# Altium PCB My_PCB.PcbDoc (part 1 of 2)
Units mm, origin at the board's own origin, x right, y up, seen from the top; angles counter-clockwise.
Board outline 160 x 126 mm, 4 copper layers (Top Layer, Layer 1, Layer 2, Bottom Layer), stack 1.646 mm thick; 190 components, 111 nets, 517 pads, 777 vias.
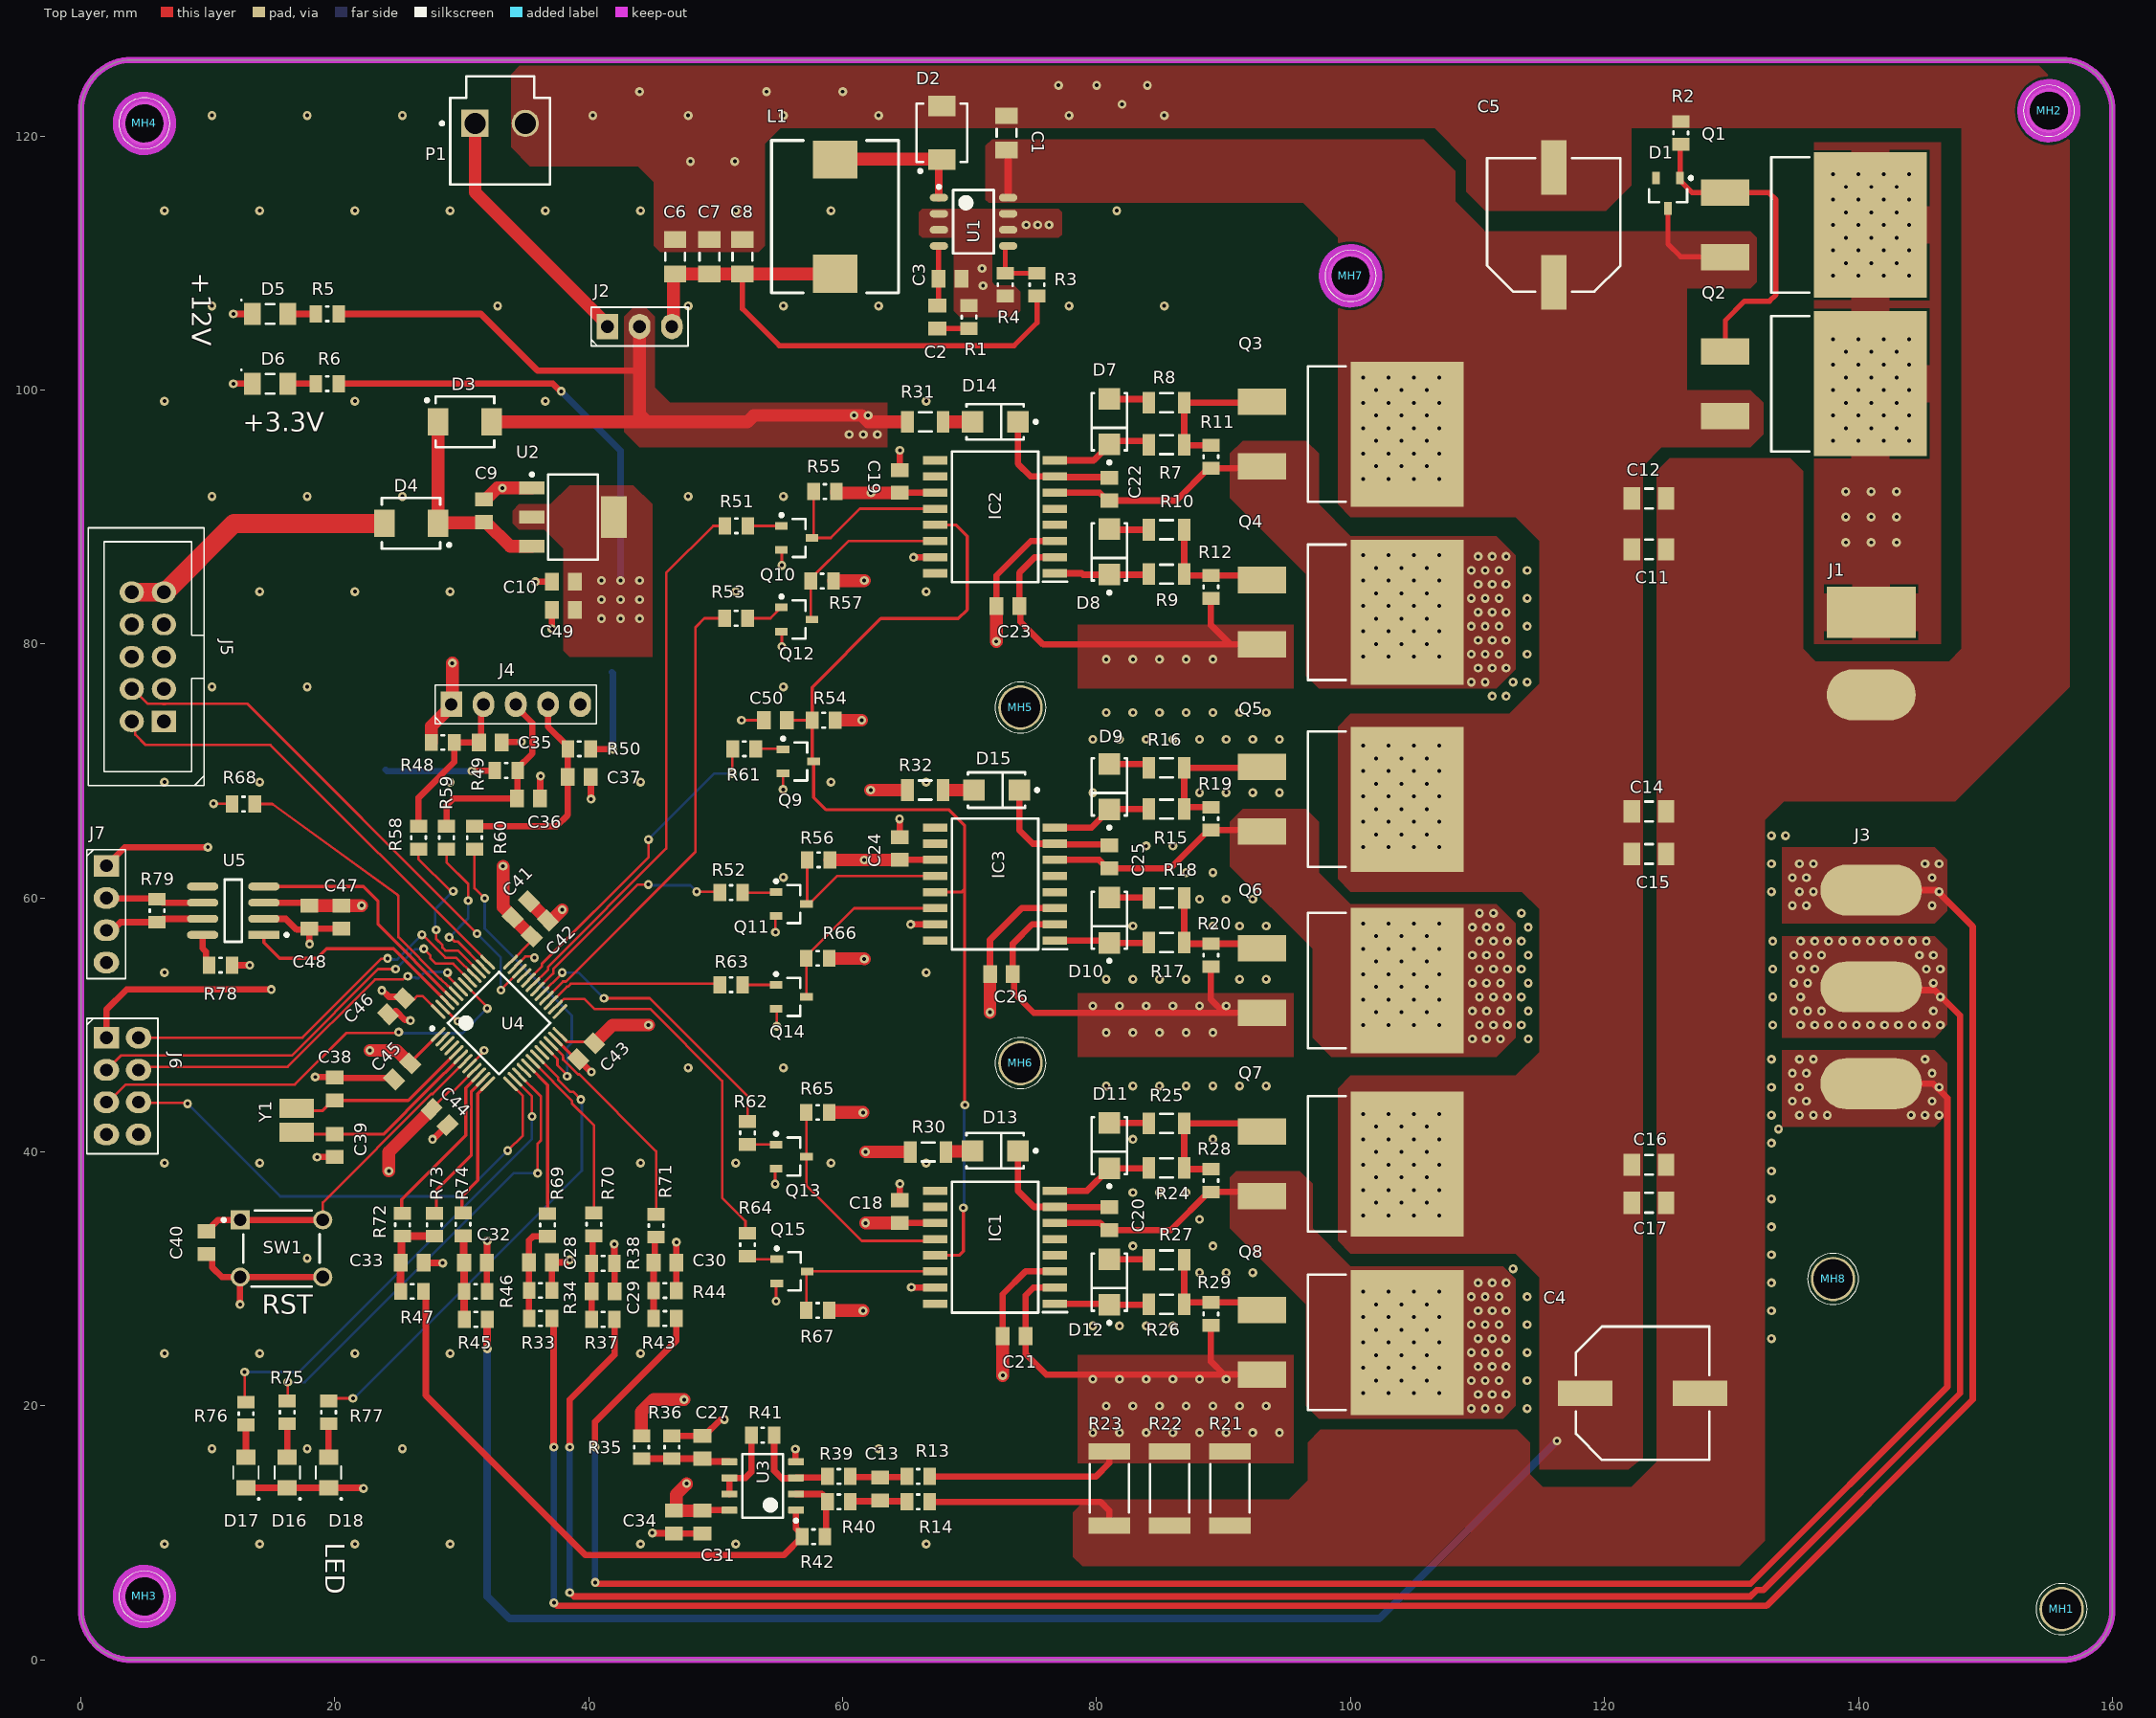
[diagram p0: Top Layer view]
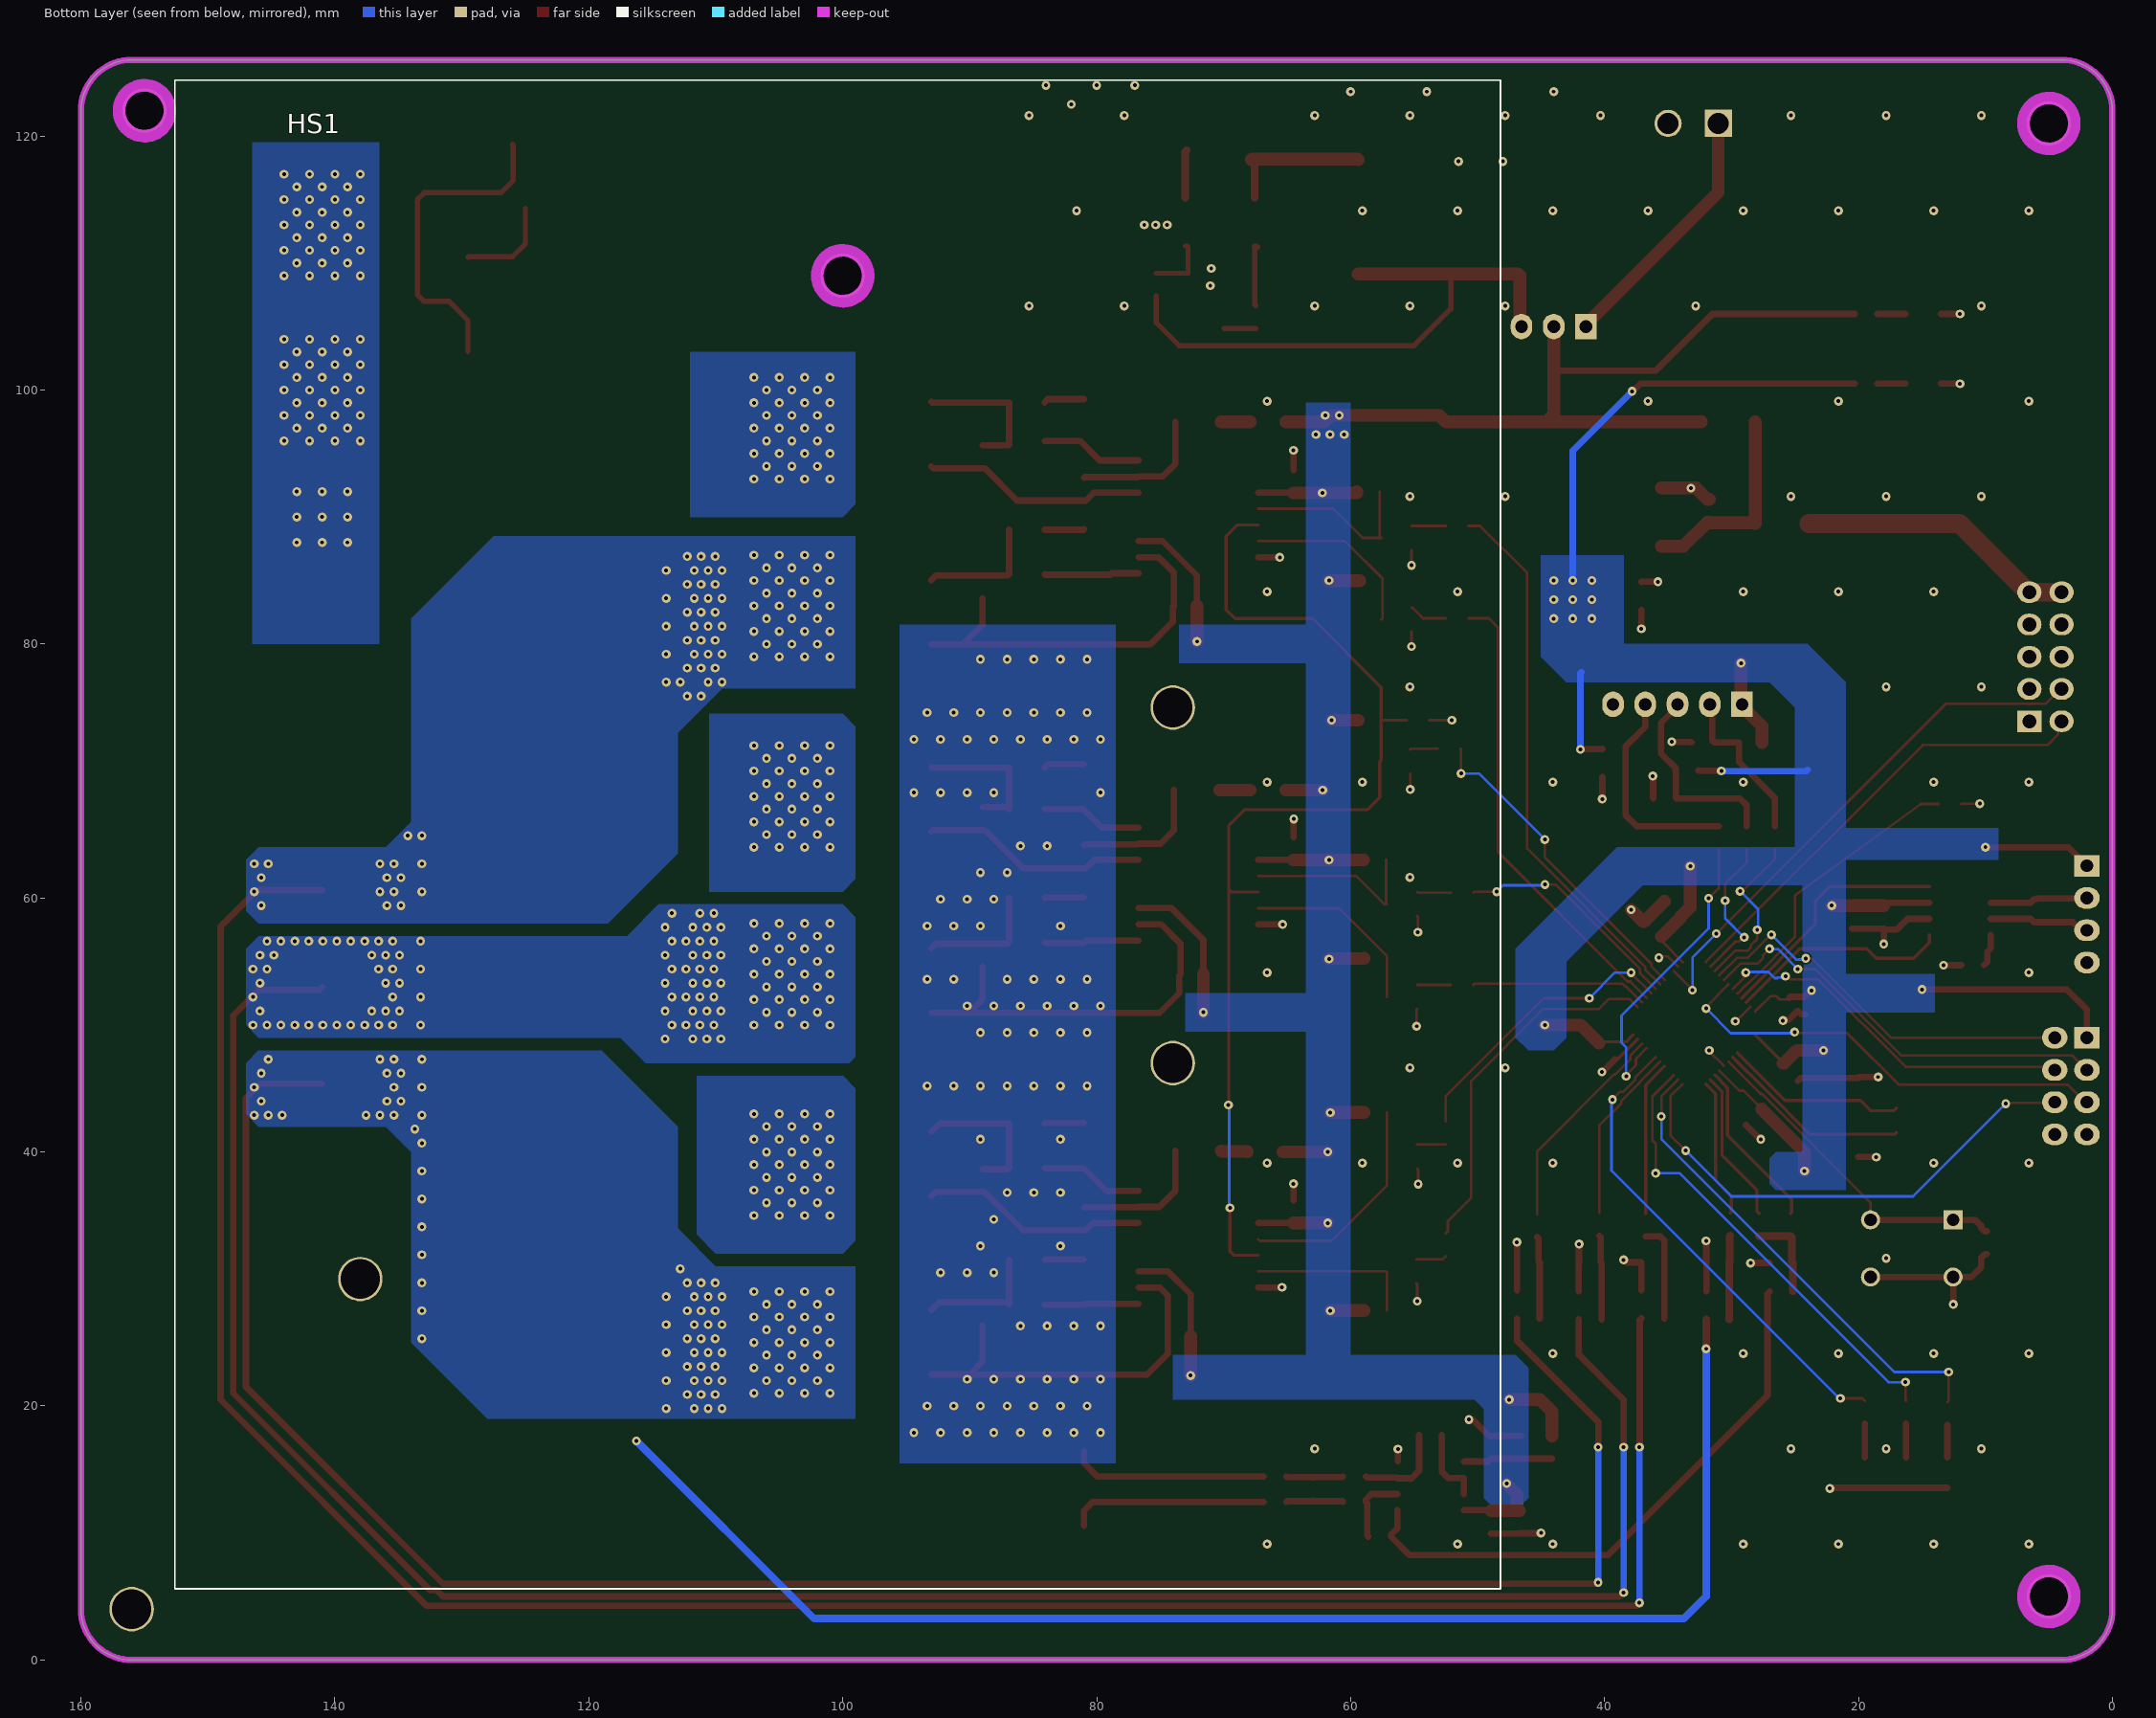
[diagram p1: Bottom Layer view, seen from below]
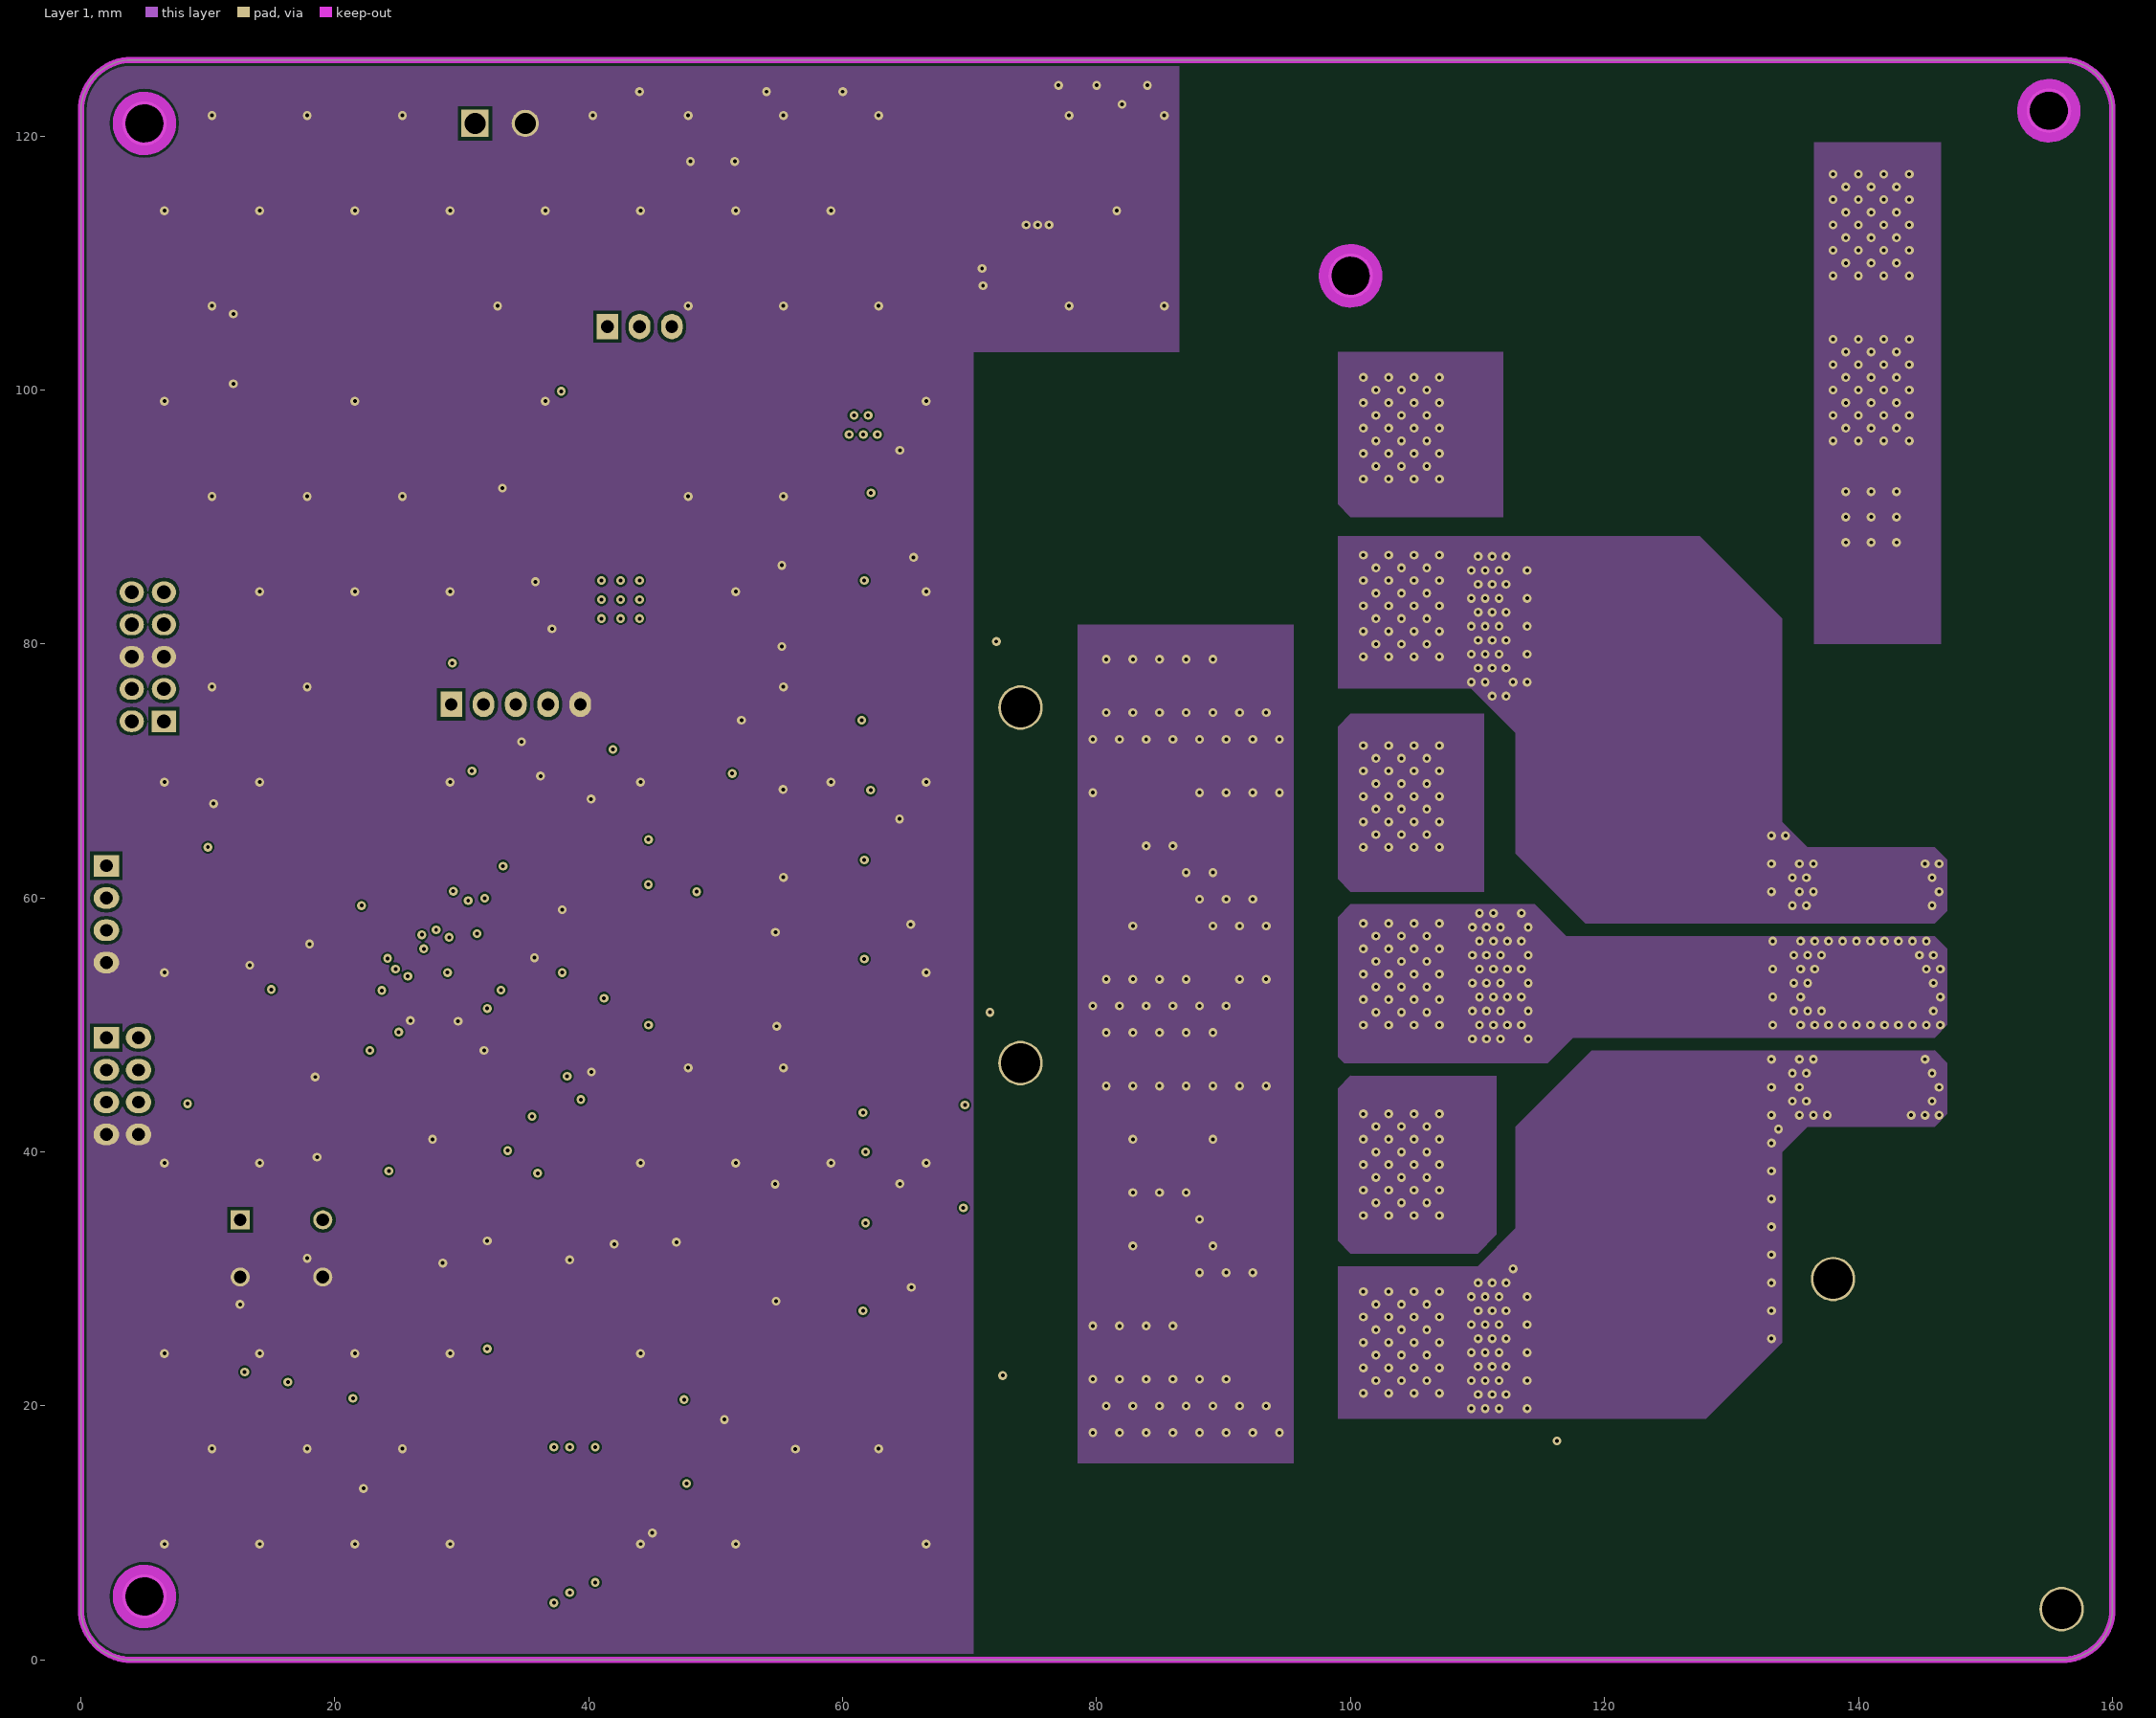
[diagram p2: Layer 1]
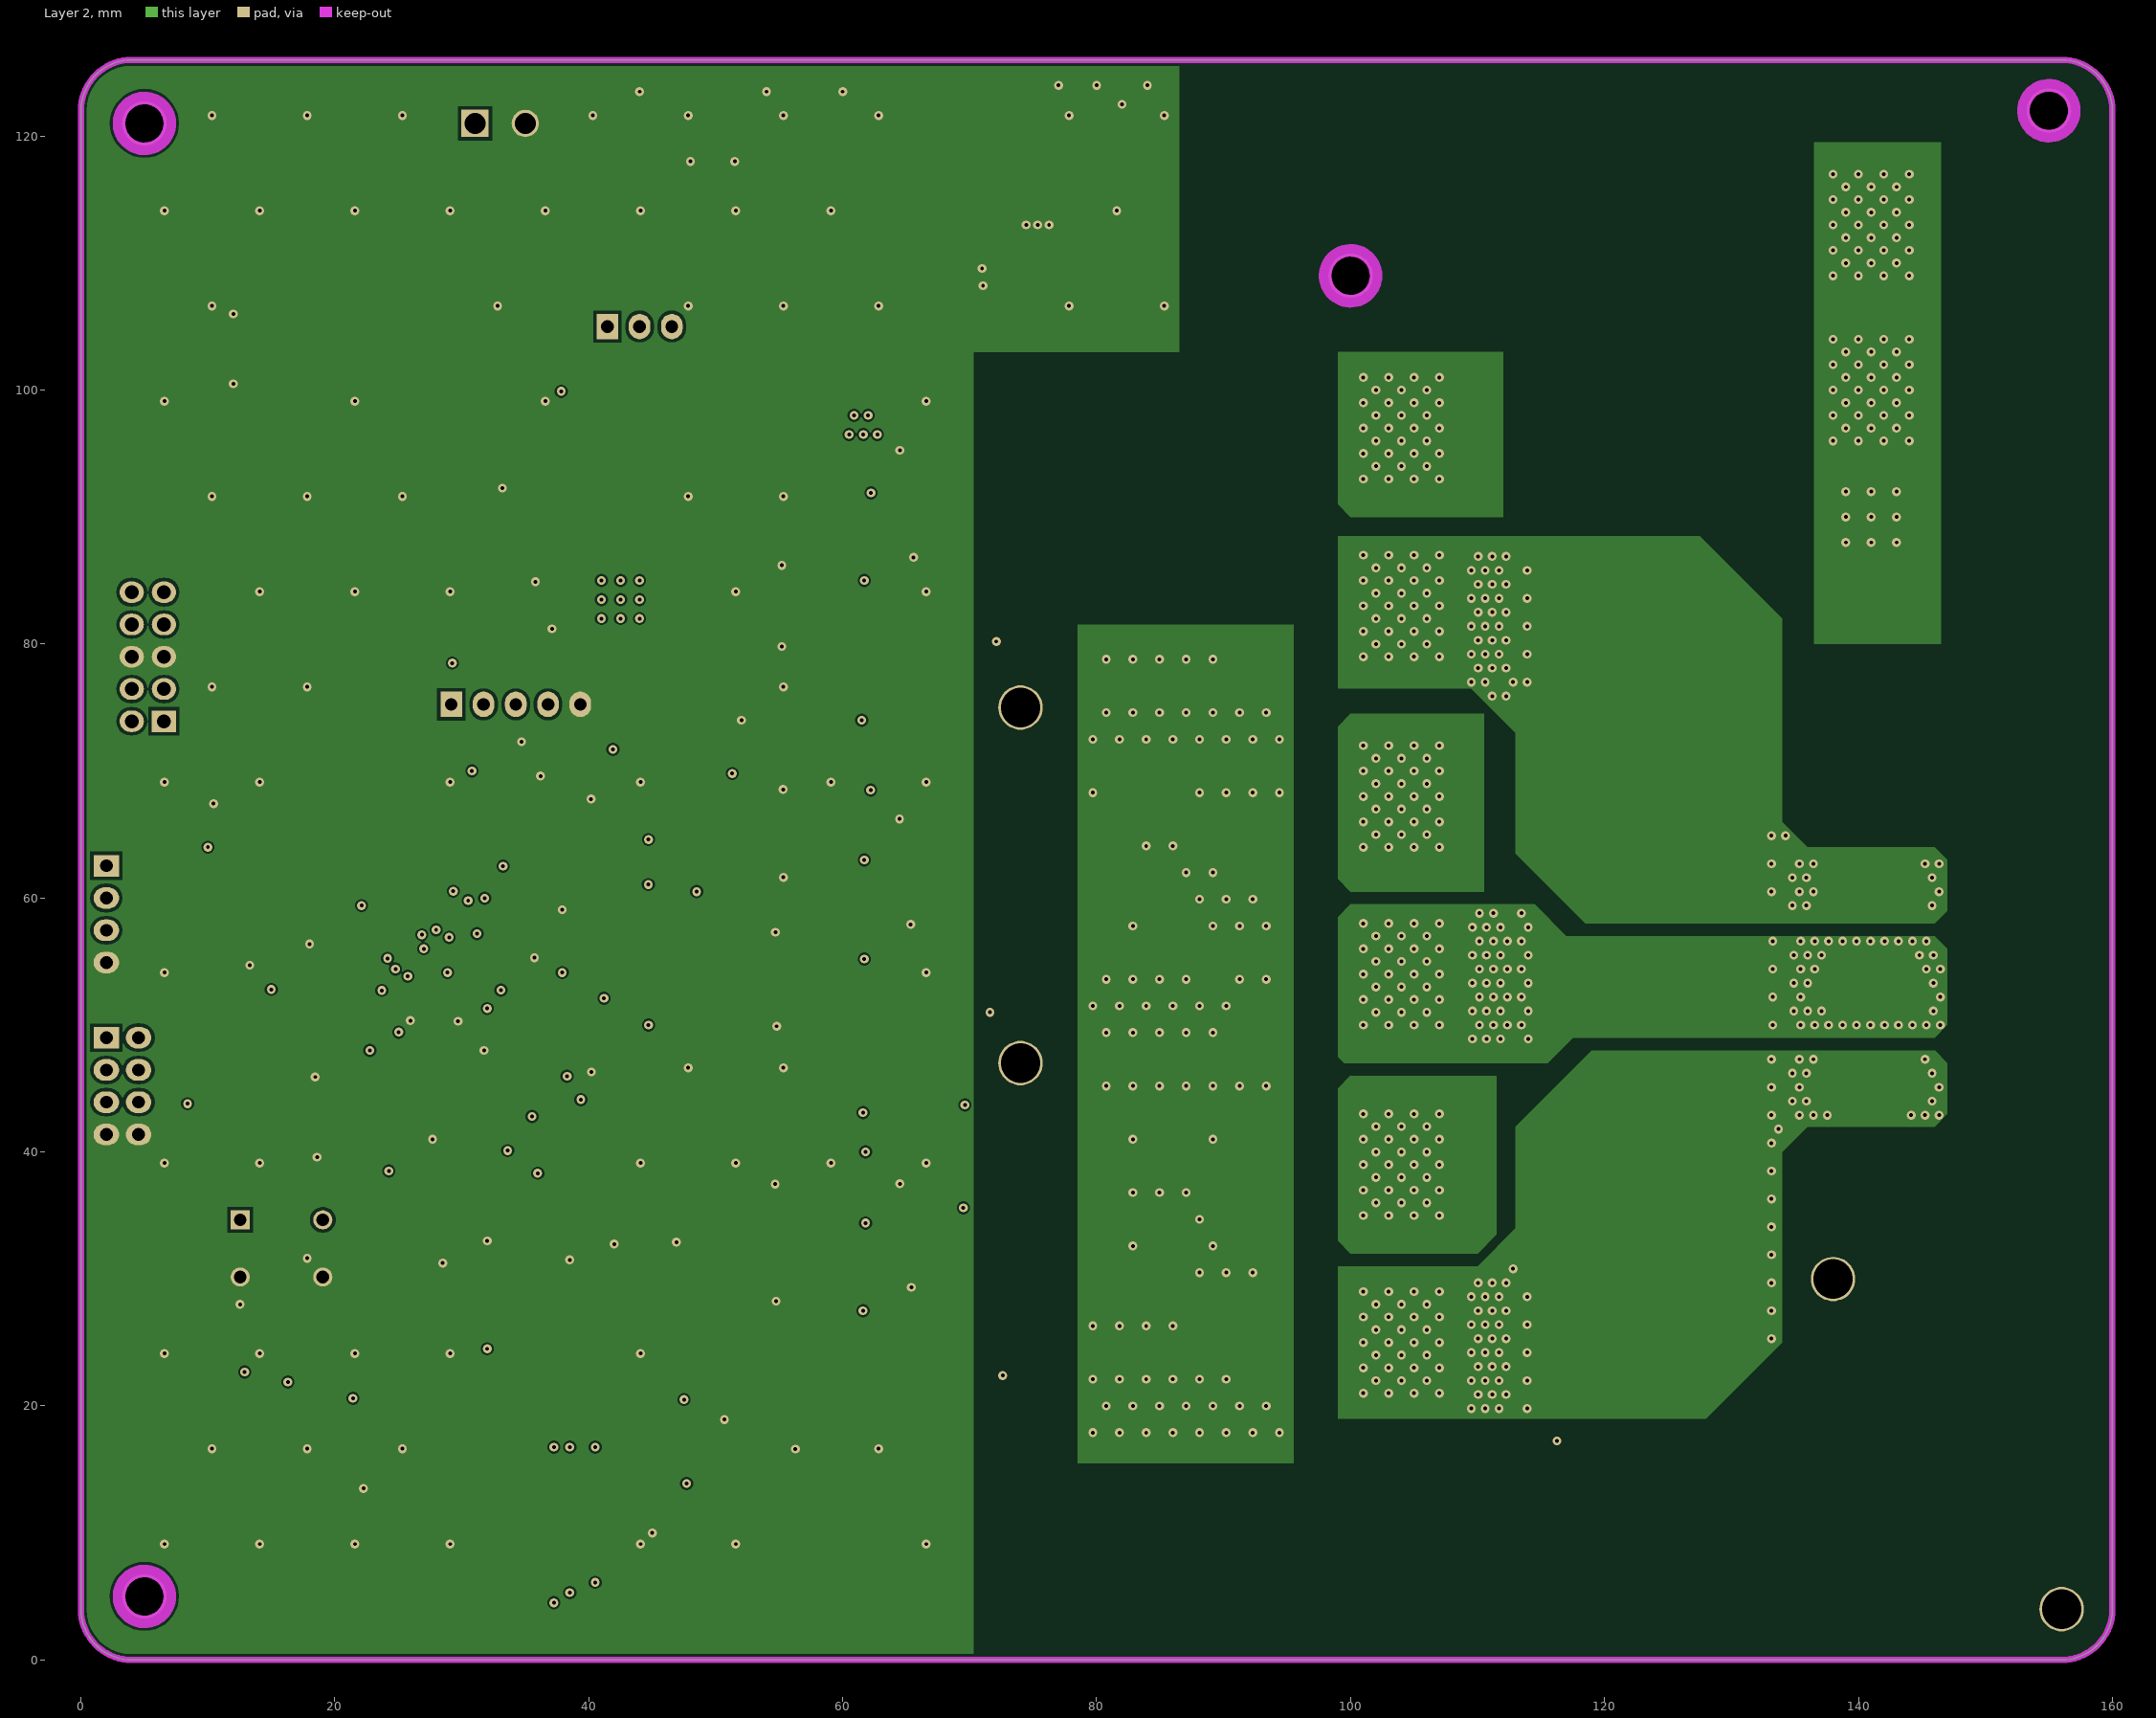
[diagram p3: Layer 2]
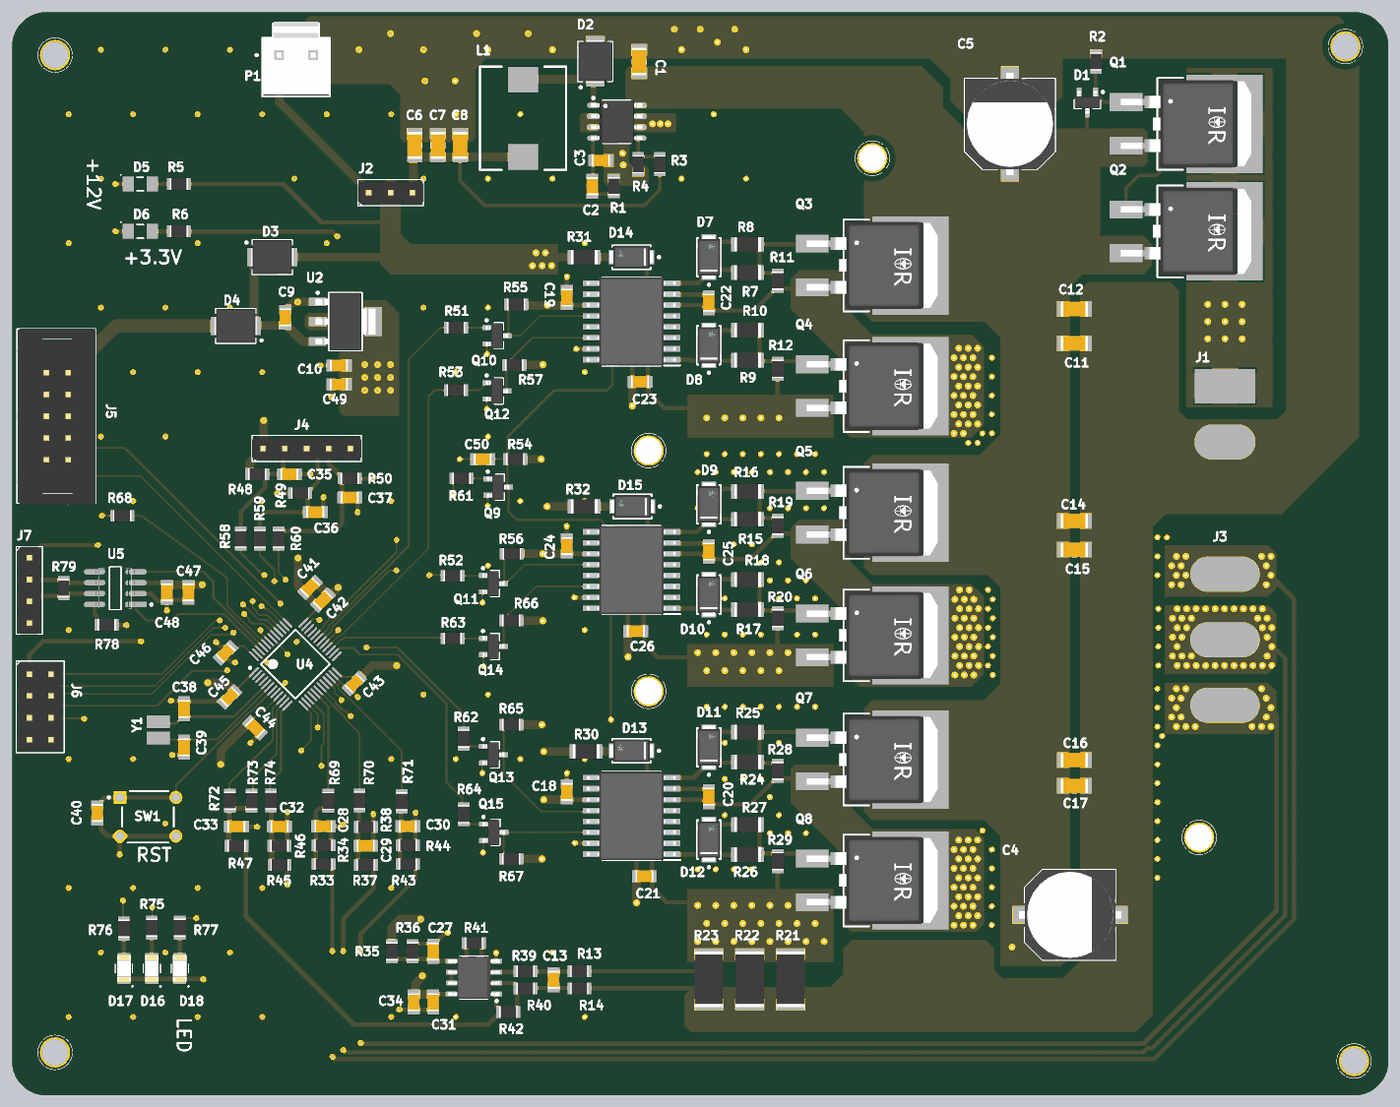
[diagram p5: 3D render of the assembled board from above, using the file's embedded part models]

## Layer stack, top to bottom
Top Solder: solder mask 0.0102, Solder Resist, Dk 3.5
Top Layer: signal copper 0.07
Dielectric 2: prepreg 0.203, PP-006, Dk 4.4
Layer 1: signal copper 0.035
Dielectric 1: dielectric 1.03, FR-4, Dk 4.8
Layer 2: signal copper 0.035
Dielectric 3: prepreg 0.203, PP-006, Dk 4.4
Bottom Layer: signal copper 0.07
Bottom Solder: solder mask 0.0102, Solder Resist, Dk 3.5

## Board outline
0,4 0,122 cw(c4,122) 4,126 156,126 cw(c156,122) 160,122 160,4 cw(c156,4) 156,0 4,0 cw(c4,4)

## Design rules (kind name [scope] priority, off if disabled: settings)
BoardOutlineClearance [All] p1: gap=0.3 ignorepadtopadclearanceinfootprint=FALSE
Clearance [All] p1: gap=0.254 ignorepadtopadclearanceinfootprint=TRUE except(0: Arc-Hole Track-Hole SMDPad-Hole THPad-Hole Via-Hole Fill-Hole Poly-Hole Region-Hole Text-Hole; 0.15: Via-Fill Via-Poly Via-Region; 0.2: Arc-Arc Arc-Track Arc-SMDPad Arc-THPad Arc-Fill Arc-Poly Arc-Region Track-Track Track-SMDPad Track-THPad Track-Fill Track-Poly Track-Region; 0.5: THPad-THPad)
ComponentClearance [All] p1: gap=0.127 collisioncheckmode=3 verticalgap=0.127 showdistances=FALSE
Height [All] p1: minheight=0 maxheight=30 prefheight=12.7
HoleSize [All] p1: absolutevalues=TRUE maxlimit=6 minlimit=0.025 maxpercent=80.000 minpercent=20.000
MinimumAnnularRing [All] p1: minimumring=0.2
MinimumSolderMaskSliver [All] p1: minsoldermaskwidth=0.1
PolygonConnect COM [All vs IsNamedPolygon('COM_L01_P020') Or IsNamedPolygon('COM_L01_P021') Or IsNamedPolygon('COM_L01_P022') Or IsNamedPolygon('COM_L02_P024') Or IsNamedPolygon('COM_L03_P023') Or IsNamedPolygon('COM_L04_P025')] p1: connectstyle=Direct reliefconductorwidth=0.254 reliefentries=4 polygonreliefangle="90 Angle" airgapwidth=0.254
PolygonConnect "3 PHASE" [All vs IsNamedPolygon('NETC20_2_L01_P005') Or IsNamedPolygon('U_L01_P003') Or IsNamedPolygon('V_L01_P004') Or IsNamedPolygon('NETC20_2_L02_P007') Or IsNamedPolygon('U_L02_P006') Or IsNamedPolygon('V_L02_P008') Or IsNamedPolygon('NETC20_2_L03_P014') Or IsNamedPolygon('U_L03_P013') Or IsNamedPolygon('V_L03_P015') Or IsNamedPolygon('NETC20_2_L04_P017') Or IsNamedPolygon('U_L04_P016') Or IsNamedPolygon('V_L04_P018') or IsNamedPolygon('U_L01_P035') Or IsNamedPolygon('V_L01_P036') or IsNamedPolygon('NETC20_2_L01_P037')] p2: connectstyle=Direct reliefconductorwidth=0.254 reliefentries=4 polygonreliefangle="90 Angle" airgapwidth=0.254
PolygonConnect +3.3V [All vs IsNamedPolygon('+3.3_L01_P034') Or IsNamedPolygon('+3.3_L04_P031')] p3: connectstyle=Direct reliefconductorwidth=0.254 reliefentries=4 polygonreliefangle="90 Angle" airgapwidth=0.254
PolygonConnect +12V [All vs IsNamedPolygon('+12_L01_P028') Or IsNamedPolygon('+12_L04_P029')] p4: connectstyle=Direct reliefconductorwidth=0.254 reliefentries=4 polygonreliefangle="90 Angle" airgapwidth=0.254
PolygonConnect PolygonConnect_GND [All vs InNet('GND')] p5: connectstyle=Direct reliefconductorwidth=2 reliefentries=4 polygonreliefangle="90 Angle" airgapwidth=0.254
PolygonConnect PolygonConnect_VM [All vs InNet('VM')] p6: connectstyle=Direct reliefconductorwidth=2 reliefentries=4 polygonreliefangle="90 Angle" airgapwidth=0.254
PolygonConnect PolygonConnect_power [All vs InNet('power')] p7: connectstyle=Relief reliefconductorwidth=3 reliefentries=4 polygonreliefangle="90 Angle" airgapwidth=0.2
PolygonConnect [All] p8: connectstyle=Relief reliefconductorwidth=0.35 reliefentries=4 polygonreliefangle="90 Angle" airgapwidth=0.254
RoutingVias [All] p1: holewidth=0.4 width=0.7 viastyle="Through Hole" minholewidth=0.3 minwidth=0.7 maxholewidth=0.7 maxwidth=1.27
SilkToSilkClearance [All] p1: silktosilkclearance=0.1
SilkToSolderMaskClearance [IsPad] p1: minsilkscreentomaskgap=0.1 clearancetoexposedcopper=TRUE
SolderMaskExpansion [All] p1: expansion=0.045 istentingtop=FALSE
UnRoutedNet [All] p1: checkbadconnections=TRUE
Width [All] p1: maxlimit=2 minlimit=0.2 preferedwidth=0.3
23 further rules are at their usual default settings.

## Components (designator, comment, footprint, x,y, rotation, side; value= is the part's Value field where it differs from the comment)
C1 "CAP" CAP_1206 72.9,120.25 r90 top value=2.2u
C2 "CAP" CAPC2012X06N 67.45,105.75 r270 top value=22n
C3 "CAP" CAPC2012X06N 68.45,108.75 r0 top value=22p
C4 "Cap_Pos" B40940 123,21 r0 top value=100u
C5 "Cap_Pos" B40940 116,113 r90 top value=100u
C6 "CAP" CAP_1206 46.8,110.5 r90 top value=4.7u
C7 "CAP" CAP_1206 49.5,110.5 r90 top value=4.7u
C8 "CAP" CAP_1206 52.1,110.5 r90 top value=4.7u
C9 "CAP" CAPC2012X06N 31.75,90.5 r90 top value=0.1u
C10 "CAP" CAPC2012X06N 38,84.896 r180 top value=10u
C11 "CAP" CAP_1206 123.5,87.462 r0 top value=0.1u
C12 "CAP" CAP_1206 123.5,91.462 r0 top value=1u
C13 "CAP" CAPC2012X06N 62.95,13.45 r270 top value=47n
C14 "CAP" CAP_1206 123.5,66.817 r0 top value=0.1u
C15 "CAP" CAP_1206 123.5,63.468 r0 top value=1u
C16 "CAP" CAP_1206 123.5,39 r0 top value=0.1u
C17 "CAP" CAP_1206 123.5,36 r0 top value=1u
C18 "CAP" CAPC2012X06N 64.5,35.305 r90 top value=0.1u
C19 "CAP" CAPC2012X06N 64.5,92.805 r90 top value=0.1u
C20 "CAP" CAPC2012X06N 81,34.75 r270 top value=1u
C21 "CAP" CAPC2012X06N 73.5,25.5 r180 top value=1u
C22 "CAP" CAPC2012X06N 81,92.198 r270 top value=1u
C23 "CAP" CAPC2012X06N 73,83 r180 top value=1u
C24 "CAP" CAPC2012X06N 64.5,63.9 r90 top value=0.1u
C25 "CAP" CAPC2012X06N 81,63.25 r270 top value=1u
C26 "CAP" CAPC2012X06N 72.5,54 r180 top value=1u
C27 "CAP" CAPC2012X06N 48.95,16.75 r90 top value=0.1u
C28 "CAP" CAPC2012X06N 36.2,31.3 r0 top value=150n
C29 "CAP" CAPC2012X06N 41.12,29.023 r0 top value=150n
C30 "CAP" CAPC2012X06N 46,31.296 r0 top value=150n
C31 "CAP" CAPC2012X06N 48.95,10.85 r270 top value=1u
C32 "CAP" CAPC2012X06N 31.082,31.272 r0 top value=150n
C33 "CAP" CAPC2012X06N 26.082,31.272 r0 top value=0.1u
C34 "CAP" CAPC2012X06N 46.7,10.85 r270 top value=0.1u
C35 "CAP" CAPC2012X06N 32.25,72.25 r0 top value=33n
C36 "CAP" CAPC2012X06N 35.25,67.841 r0 top value=33n
C37 "CAP" CAPC2012X06N 39.25,69.546 r0 top value=33n
C38 "CAP" CAPC2012X06N 20,44.957 r90 top value=6p
C39 "CAP" CAPC2012X06N 20,40.5 r270 top value=6p
C40 "CAP" CAPC2012X06N 9.9,32.85 r270 top value=0.1u
C41 "CAP" CAPC2012X06N 34.641,59.102 r45 top value=4.7u
C42 "CAP" CAPC2012X06N 36.141,57.602 r45 top value=0.1u
C43 "CAP" CAPC2012X06N 39.798,47.93 r225 top value=0.1u
C44 "CAP" CAPC2012X06N 28.25,42.75 r315 top value=0.1u
C45 "CAP" CAPC2012X06N 25.295,46.348 r225 top value=0.1u
C46 "CAP" CAPC2012X06N 24.825,51.475 r225 top value=0.1u
C47 "CAP" CAPC2012X06N 20.5,58.5 r90 top value=1u
C48 "CAP" CAPC2012X06N 18,58.5 r90 top value=0.1u
C49 "CAP" CAPC2012X06N 38,82.691 r180 top value=10u
C50 "CAP" CAPC2012X06N 54.7,74 r180 top value=1u
D1 "BZX84-C12" SOT23 125,115.5 r270 top
D2 "STPS2L40U" CAPM3216X18N 67.8,120.25 r90 top
D3 "STPS2L40U" CAPM3216X18N 30.25,97.5 r0 top
D4 "STPS2L40U" CAPM3216X18N 26,89.5 r180 top
D5 "GREEN" DIOC3216X06N 14.9,106 r0 top
D6 "GREEN" DIOC3216X06N 14.9,100.5 r0 top
D7 "ES1D-E3/61T" FP-95400-MFG 81,97.5 r90 top value="10 pF"
D8 "ES1D-E3/61T" FP-95400-MFG 81,87.25 r90 top value="10 pF"
D9 "ES1D-E3/61T" FP-95400-MFG 81,68.75 r90 top value="10 pF"
D10 "ES1D-E3/61T" FP-95400-MFG 81,58.25 r90 top value="10 pF"
D11 "ES1D-E3/61T" FP-95400-MFG 81,40.5 r90 top value="10 pF"
D12 "ES1D-E3/61T" FP-95400-MFG 81,29.75 r90 top value="10 pF"
D13 "ES1D-E3/61T" FP-95400-MFG 72,40.091 r180 top value="10 pF"
D14 "ES1D-E3/61T" FP-95400-MFG 72,97.5 r180 top value="10 pF"
D15 "ES1D-E3/61T" FP-95400-MFG 72.11,68.5 r180 top value="10 pF"
D16 "LED_GREEN" LED_3216 16.25,14.75 r270 top
D17 "LED_GREEN" LED_3216 13,14.75 r270 top
D18 "LED_GREEN" LED_3216 19.5,14.75 r270 top
HS1 "Heat Sink" "Heat Sink" 50,65 r90 bottom
IC1 "IR2110STRPBF" SOIC127P1032X265-16N 72,32.5 r180 top
IC2 "IR2110STRPBF" SOIC127P1032X265-16N 72,90.017 r180 top
IC3 "IR2110STRPBF" SOIC127P1032X265-16N 72,61.1 r180 top
J1 "Power" "Power Connector" 141,82.5 r270 top
J2 "Jp3" "HEADER 1X3 2.54MM" 44,105 r0 top
J3 "Power 3" "POWER 3" 141,53 r270 top
J4 "Header 1x5 2.54mm" "Header 1x5 2.54mm" 29.17,75.25 r0 top
J5 "IDC-10MS" IDC-10MS 5.27,79 r90 top
J6 "Header 2x4 2.54mm" "Header 2x4 2.54mm" 3.27,45.19 r270 top
J7 "Header 1x4 2.54mm" "Header 1x4 2.54mm" 2,62.54 r270 top
L1 "HE1040" HE1040 59.4,113.65 r270 top value=100u
MH1 "MH" MH 156,4 r0 top
MH2 "MH" MH 155,122 r0 top
MH3 "MH" MH 5,5 r0 top
MH4 "MH" MH 5,121 r0 top
MH5 "MH" MH 74,75 r0 top
MH6 "MH" MH 74,47 r0 top
MH7 "MH" MH 100,109 r0 top
MH8 "MH" MH 138,30 r0 top
P1 "B2P-VH(LF)(SN)" JST-B2P-VH(LF)(SN)_V 33.02,119.6 r0 top
Q1 "IRF4905STRLPBF" FP-PG-TO263-3-MFG 136.5,113 r270 top
Q2 "IRF4905STRLPBF" FP-PG-TO263-3-MFG 136.5,100.5 r270 top
Q3 "IRF1010ZSTRLPBF" FP-PG-TO263-3-MFG 100,96.527 r270 top
Q4 "IRF1010ZSTRLPBF" FP-PG-TO263-3-MFG 100,82.5 r270 top
Q5 "IRF1010ZSTRLPBF" FP-PG-TO263-3-MFG 100,67.775 r270 top
Q6 "IRF1010ZSTRLPBF" FP-PG-TO263-3-MFG 100,53.5 r270 top
Q7 "IRF1010ZSTRLPBF" FP-PG-TO263-3-MFG 100,39.058 r270 top
Q8 "IRF1010ZSTRLPBF" FP-PG-TO263-3-MFG 100,25 r270 top
Q9 "NPN" SOT23 56.5,70.75 r0 top
Q10 "NPN" SOT23 56.372,88.355 r0 top
Q11 "NPN" SOT23 55.95,59.523 r0 top
Q12 "NPN" SOT23 56.372,81.933 r0 top
Q13 "NPN" SOT23 55.95,39.636 r0 top
Q14 "NPN" SOT23 55.95,52.21 r0 top
Q15 "NPN" SOT23 56,30.6 r0 top
R1 "Resistor" RESC2012X06N 69.95,105.75 r270 top value=13k
R2 "Resistor" RESC2012X06N 126,120.25 r270 top value=4.7k
R3 "Resistor" RESC2012X06N 75.3,108.3 r270 top value=43k
R4 "Resistor" RESC2012X06N 72.8,108.3 r90 top value=5.1k
R5 "Resistor" RESC2012X06N 19.4,106 r0 top value=1k
R6 "Resistor" RESC2012X06N 19.4,100.5 r0 top value=330
R7 "1k" RESC3016X06N 85.5,95.7 r0 top value=20
R8 "1k" RESC3016X06N 85.5,99 r0 top value=0
R9 "1k" RESC3016X06N 85.5,85.5 r0 top value=20
R10 "1k" RESC3016X06N 85.5,89 r0 top value=0
R11 "10k" RESC2012X06N 89,94.75 r90 top
R12 "10k" RESC2012X06N 89,84.5 r90 top
R13 "Resistor" RESC2012X06N 65.95,14.45 r180 top value=1k
R14 "Resistor" RESC2012X06N 65.95,12.45 r180 top value=1k
R15 "1k" RESC3016X06N 85.5,67 r0 top value=20
R16 "1k" RESC3016X06N 85.5,70.25 r0 top value=0
R17 "1k" RESC3016X06N 85.5,56.5 r0 top value=20
R18 "1k" RESC3016X06N 85.5,60 r0 top value=0
R19 "10k" RESC2012X06N 89,66.25 r90 top
R20 "10k" RESC2012X06N 89,55.5 r90 top
R21 "Resistor" RESC2512 90.5,13.5 r90 top value=40m
R22 "Resistor" RESC2512 85.75,13.5 r90 top value=40m
R23 "Resistor" RESC2512 81,13.5 r90 top value=40m
R24 "1k" RESC3016X06N 85.5,38.75 r0 top value=20
R25 "1k" RESC3016X06N 85.5,42.25 r0 top value=0
R26 "1k" RESC3016X06N 85.5,28 r0 top value=20
R27 "1k" RESC3016X06N 85.5,31.5 r0 top value=0
R28 "10k" RESC2012X06N 89,37.75 r90 top
R29 "10k" RESC2012X06N 89,27.25 r90 top
R30 "Resistor" RESC3016X06N 66.731,40 r0 top value=0
R31 "Resistor" RESC3016X06N 66.5,97.5 r0 top value=0
R32 "Resistor" RESC3016X06N 66.5,68.5 r0 top value=0
R33 "Resistor" RESC2012X06N 36.2,26.892 r0 top value=12k
R34 "Resistor" RESC2012X06N 36.2,29.096 r180 top value=1.5k
R35 "Resistor" RESC2012X06N 44.15,16.75 r90 top value=47k
R36 "Resistor" RESC2012X06N 46.55,16.75 r270 top value=7.5k
R37 "Resistor" RESC2012X06N 41.12,26.818 r0 top value=12k
R38 "Resistor" RESC2012X06N 41.12,31.227 r180 top value=1.5k
R39 "Resistor" RESC2012X06N 59.7,14.45 r180 top value=9.1k
R40 "Resistor" RESC2012X06N 59.7,12.45 r180 top value=9.1k
R41 "Resistor" RESC2012X06N 53.7,17.7 r180 top value=68k
R42 "Resistor" RESC2012X06N 57.7,9.7 r0 top value=68k
R43 "Resistor" RESC2012X06N 46,26.887 r0 top value=12k
R44 "Resistor" RESC2012X06N 46,29.091 r180 top value=1.5k
R45 "Resistor" RESC2012X06N 31.1,26.817 r0 top value=12k
R46 "Resistor" RESC2012X06N 31.082,29.022 r180 top value=1.5k
R47 "Resistor" RESC2012X06N 26.082,29.022 r180 top value=1k
R48 "Resistor" RESC2012X06N 28.5,72.25 r180 top value=4.7k
R49 "Resistor" RESC2012X06N 33.5,70.046 r180 top value=4.7k
R50 "Resistor" RESC2012X06N 39.25,71.75 r0 top value=4.7k
R51 "Resistor" RESC2012X06N 51.622,89.305 r0 top value=4.7k
R52 "Resistor" RESC2012X06N 51.214,60.423 r0 top value=4.7k
R53 "Resistor" RESC2012X06N 51.6,82.025 r0 top value=4.7k
R54 "Resistor" RESC2012X06N 58.5,74 r0 top value=10k
R55 "Resistor" RESC2012X06N 58.6,92 r180 top value=10k
R56 "Resistor" RESC2012X06N 58.1,63.002 r180 top value=10k
R57 "Resistor" RESC2012X06N 58.38,84.961 r180 top value=10k
R58 "Resistor" RESC2012X06N 26.591,64.75 r90 top value=0
R59 "Resistor" RESC2012X06N 28.796,64.75 r90 top value=0
R60 "Resistor" RESC2012X06N 31,64.75 r90 top value=0
R61 "Resistor" RESC2012X06N 52.25,71.75 r180 top value=4.7k
R62 "Resistor" RESC2012X06N 52.5,41.5 r270 top value=4.7k
R63 "Resistor" RESC2012X06N 51.214,53.166 r0 top value=4.7k
R64 "Resistor" RESC2012X06N 52.5,32.7 r270 top value=4.7k
R65 "Resistor" RESC2012X06N 58.032,43.116 r180 top value=10k
R66 "Resistor" RESC2012X06N 58.032,55.251 r180 top value=10k
R67 "Resistor" RESC2012X06N 58.032,27.525 r180 top value=10k
R68 "Resistor" RESC2012X06N 12.8,67.4 r180 top value=10k
R69 "Resistor" RESC2012X06N 36.75,34.25 r270 top value=0
R70 "Resistor" RESC2012X06N 40.4,34.3 r270 top value=0
R71 "Resistor" RESC2012X06N 45.3,34.2 r270 top value=0
R72 "Resistor" RESC2012X06N 25.332,34.272 r270 top value=0
R73 "Resistor" RESC2012X06N 27.832,34.272 r270 top value=0
R74 "Resistor" RESC2012X06N 30.1,34.3 r270 top value=0
R75 "Resistor" RESC2012X06N 16.25,19.5 r90 top value=1k
R76 "Resistor" RESC2012X06N 13,19.4 r90 top value=1k
R77 "Resistor" RESC2012X06N 19.5,19.5 r90 top value=1k
R78 "Resistor" RESC2012X06N 11,54.718 r180 top value=10k
R79 "Resistor" RESC2012X06N 6,59 r270 top value=120
SW1 "B3F-1000" OMRON-B3F-1000-4_V 15.8,32.4 r0 top
U1 "L5972D" SO-8 70.3,113.25 r0 top
U2 "LD1117S33TR" STM-SOT-223_M 38.75,90 r0 top
U3 "MC33078DR" D0008A_L 53.7,13.7 r180 top
U4 "STM32F303CBT6" STM-LQFP48_L 32.934,50.155 r45 top
U5 "SN65HVD230DR" FP-D0008A-IPC_A 12,59 r180 top
Y1 "NX3225GD-8MHZ-STD-CRA-3" NDK-NX3225GD-8MHZ-STD-CRA-3_V 17,42.5 r270 top

## Footprints (in the part's own frame and the unit in brackets; to place one, negate y for a bottom-side part, rotate by r counter-clockwise, add the part's x,y. Pads: shape width x height; smd on the part's side, far side on the other; paste and mask are expansions set on the pad)
B40940 [mm] "Aluminum Electrolytic Capacitor, Body 10,30x10,30x10,50mm, IPC Low Density"
  rect 4.3x2 smd: 1(-4.525,0) 2(4.525,0)
  silkscreen extent -5.25,-5.25 5.25,5.25, body extent -5.95,-5.25 5.95,5.25, height 10.5
CAP_1206 [mm]
  rect 1.3x1.75 smd: 1(-1.35,0) 2(1.35,0)
  silkscreen extent -0.3,-0.77 0.3,0.77, body extent -1.6,-0.85 1.6,0.85, height 1.5
CAPC2012X06N [mm] "Chip Capacitor, 2-Leads, Body 2,00x1,25mm, IPC Medium Density"
  rect 1.1x1.4 smd: 1(-0.9,0) 2(0.9,0)
  body extent -1.05,-0.67 1.05,0.67, height 0.6
CAPM3216X18N [mm]
  rect 1.62x2.15 smd: 1(-2.11,0) 2(2.11,0)
  silkscreen extent -3.12,-2 2.3,2, body extent -2.52,-1.97 2.52,1.97, height 2.45
D0008A_L [mm] "SOIC, 8-Leads, Body 5x4mm, Pitch 1.27mm, IPC High Density"
  rrect18% 1.25x0.55 smd: 1(-2.625,1.905) 2(-2.625,0.635) 3(-2.625,-0.635) 4(-2.625,-1.905) 5(2.625,-1.905) 6(2.625,-0.635) 7(2.625,0.635) 8(2.625,1.905)
  silkscreen extent -2.75,-2.5 1.6,2.85, body extent -3,-2.45 3,2.45, height 1.63
DIOC3216X06N [mm] "Chip Diode, 2-Leads, Body 3,15x1,60mm, IPC Medium Density"
  rect 1.3x1.75 smd: 1(-1.4,0) 2(1.4,0)
  silkscreen extent -2.31,-0.77 0.35,1.14, body extent -1.65,-0.85 1.65,0.85, height 0.6
FP-95400-MFG [mm]
  rect 1.7x1.68 smd paste+0 mask+0: 1(-1.79,0) 2(1.79,0)
  silkscreen extent -3.32,-1.4 2.25,1.4, body extent -2.74,-1.5 2.74,1.5, height 0.25
FP-D0008A-IPC_A [mm]
  rect 2.469x0.622 smd paste+0 mask+0: 1(-2.414,1.905)
  rrect100% 2.469x0.622 smd paste+0 mask+0: 2(-2.414,0.635) 3(-2.414,-0.635) 4(-2.414,-1.905) 5(2.414,-1.905) 6(2.414,-0.635) 7(2.414,0.635) 8(2.414,1.905)
  silkscreen extent -4.32,-2.45 0.68,2.45, body extent -4.15,-2.95 4.15,2.95, height 0.25
FP-PG-TO263-3-MFG [mm]
  rect 11.43x8.89 smd paste+0 mask+0: D(0,4.445)
  rect 2.08x3.81 smd paste+0 mask+0: G(-2.54,-6.985) S(2.54,-6.985)
  silkscreen extent -5.34,-3.36 5.34,-0.38, body extent -5.81,-8.99 5.81,8.99, height 0.25
HE1040 [mm]
  rect 3x3.5 smd: 1(-4.5,0) 2(4.5,0)
  silkscreen extent -6,-5 6,5
"HEADER 1X3 2.54MM" [mm]
  rect 1.7x2 hole 1: 1(-2.54,0)
  oval 1.7x2 hole 1: 2(0,0) 3(2.54,0)
  silkscreen extent -3.81,-1.52 3.81,1.52, body extent -3.81,-1.27 3.81,1.27, height 8.54
"Header 1x4 2.54mm" [mm]
  rect 1.7x2 hole 1: 1(0,0)
  oval 1.7x2 hole 1: 2(2.54,0) 3(5.08,0) 4(7.62,0)
  silkscreen extent -1.27,-1.52 8.89,1.52, body extent -1.27,-1.27 8.89,1.27, height 8.54
"Header 1x5 2.54mm" [mm]
  rect 1.7x2 hole 1: 1(0,0)
  oval 1.7x2 hole 1: 2(2.54,0) 3(5.08,0) 4(7.62,0) 5(10.16,0)
  silkscreen extent -1.27,-1.52 11.43,1.52, body extent -1.27,-1.27 11.43,1.27, height 8.54
"Header 2x4 2.54mm" [mm]
  rect 1.7x2 hole 1: 1(-3.81,-1.27)
  oval 1.7x2 hole 1: 2(-3.81,1.27) 3(-1.27,-1.27) 4(-1.27,1.27) 5(1.27,-1.27) 6(1.27,1.27) 7(3.81,-1.27) 8(3.81,1.27)
  silkscreen extent -5.33,-2.79 5.33,2.79, body extent -5.08,-2.54 5.08,2.54, height 8.54
"Heat Sink" [mm]
  silkscreen extent -59.4,-1.8 59.4,102.6, body extent -58,0 58,100, height 26.51
IDC-10MS [mm] "2x5 2.54mm"
  rect 1.7x1.9 hole 1.1: 1(-5.08,-1.27)
  oval 1.7x1.9 hole 1.1: 2(-5.08,1.27) 3(-2.54,-1.27) 4(-2.54,1.27) 5(0,-1.27) 6(0,1.27) 7(2.54,-1.27) 8(2.54,1.27) 9(5.08,-1.27) 10(5.08,1.27)
  silkscreen extent -10.15,-4.42 10.15,4.7, body extent -10.18,-4.43 10.18,4.68, height 9.1
JST-B2P-VH(LF)(SN)_V [mm] "THD, 2-Leads, Body 8.5x7.86mm, Pitch 3.96mm"
  rect 2.15x2.15 hole 1.65: 1(-1.98,1.4)
  round 2.15 hole 1.65: 2(1.98,1.4)
  silkscreen extent -4.7,-3.4 3.93,5.1, body extent -3.93,-3.2 3.93,5.3, height 10.9
LED_3216 [mm]
  rect 1.2x1.5 smd: A(-1.2,0) K(1.2,0)
  silkscreen extent -0.5,-1 2.1,1.02, body extent -1.6,-0.8 1.6,0.8, height 1.1
MH [mm]
  round 3.5 hole 3.1: 1(0,0)
  silkscreen extent -2.01,-2.01 2.01,2.01
NDK-NX3225GD-8MHZ-STD-CRA-3_V [mm] "SMD, 2-Leads, Body 3.2x2.5mm"
  rect 1.5x2.7 smd: 1(-0.95,0) 2(0.95,0)
  body extent -1.6,-1.25 1.6,1.25, height 1
OMRON-B3F-1000-4_V [mm] "TH, 4-Leads, Body 6x6mm"
  rect 1.5x1.5 hole 1 paste+0: 1(-3.25,2.25)
  round 1.5 hole 1 paste+0: 2(3.25,2.25) 4(3.25,-2.25)
  round 1.5 hole 1 paste+0 mask+0.102: 3(-3.25,-2.25)
  silkscreen extent -4.67,-3 3,3, body extent -3.4,-3 3.4,3, height 4.5
"POWER 3" [mm]
  oval 4x8 smd: 1(-7.62,0) 2(0,0) 3(7.62,0)
"Power Connector" [mm]
  rect 4x7 smd: 1(0,0)
  oval 4x7 smd: 2(6.5,0)
RESC2012X06N [mm] "Chip Resistor, 2-Leads, Body 2,00x1,25mm, IPC Medium Density"
  rect 1x1.35 smd: 1(-0.9,0) 2(0.9,0)
  silkscreen extent -0.1,-0.58 0.1,0.58, body extent -1.05,-0.67 1.05,0.67, height 0.6
RESC2512 [mm] "Chip Resistor, 2-Leads, Body 6,35x3,20mm, IPC Medium Density"
  rect 1.3x3.3 smd: 1(-2.925,0) 2(2.925,0)
  silkscreen extent -1.9,-1.55 1.9,1.55, body extent -3.22,-1.65 3.22,1.65, height 0.6
RESC3016X06N [mm] "Chip Resistor, 2-Leads, Body 3,05x1,60mm, IPC Medium Density"
  rect 1x1.7 smd: 1(-1.4,0) 2(1.4,0)
  silkscreen extent -0.5,-0.75 0.5,0.75, body extent -1.55,-0.85 1.55,0.85, height 0.6
SO-8 [mm] "SO-8, 8-Leads, Body 4,90x3,90mm, Pitch 1,27mm, IPC Medium Density"
  oval 1.45x0.6 smd: 1(-2.725,1.905) 2(-2.725,0.635) 3(-2.725,-0.635) 4(-2.725,-1.905) 5(2.725,-1.905) 6(2.725,-0.635) 7(2.725,0.635) 8(2.725,1.905)
  silkscreen extent -2.85,-2.5 1.6,2.88, body extent -3,-2.5 3,2.5, height 1.75
SOIC127P1032X265-16N [mm]
  rect 1.925x0.65 smd: 1(-4.712,4.445) 2(-4.712,3.175) 3(-4.712,1.905) 4(-4.712,0.635) 5(-4.712,-0.635) 6(-4.712,-1.905) 7(-4.712,-3.175) 8(-4.712,-4.445) 9(4.712,-4.445) 10(4.712,-3.175) 11(4.712,-1.905) 12(4.712,-0.635) 13(4.712,0.635) 14(4.712,1.905) 15(4.712,3.175) 16(4.712,4.445)
  silkscreen extent -5.68,-5.15 3.4,5.15, body extent -5.16,-5.15 5.16,5.15, height 2.65
SOT23 [mm] "SOT23, 3-Leads, Body 2,90x2,45mm, Pitch 0,95mm, IPC Medium Density"
  rect 1x0.6 smd: 1(-1.2,0.95) 2(-1.2,-0.95) 3(1.2,0)
  silkscreen extent -1.32,-1.5 0.7,1.93, body extent -1.3,-1.5 1.3,1.5, height 1.1
STM-LQFP48_L [mm] "QFP, 48-Leads, Body 7x7mm, Pitch 0.5mm, IPC High Density"
  oval 1.55x0.25 smd: 1(-4.025,2.75) 2(-4.025,2.25) 3(-4.025,1.75) 4(-4.025,1.25) 5(-4.025,0.75) 6(-4.025,0.25) 7(-4.025,-0.25) 8(-4.025,-0.75) 9(-4.025,-1.25) 10(-4.025,-1.75) 11(-4.025,-2.25) 12(-4.025,-2.75) 25(4.025,-2.75) 26(4.025,-2.25) 27(4.025,-1.75) 28(4.025,-1.25) 29(4.025,-0.75) 30(4.025,-0.25) 31(4.025,0.25) 32(4.025,0.75) 33(4.025,1.25) 34(4.025,1.75) 35(4.025,2.25) 36(4.025,2.75)
  oval 0.25x1.55 smd: 13(-2.75,-4.025) 14(-2.25,-4.025) 15(-1.75,-4.025) 16(-1.25,-4.025) 17(-0.75,-4.025) 18(-0.25,-4.025) 19(0.25,-4.025) 20(0.75,-4.025) 21(1.25,-4.025) 22(1.75,-4.025) 23(2.25,-4.025) 24(2.75,-4.025) 37(2.75,4.025) 38(2.25,4.025) 39(1.75,4.025) 40(1.25,4.025) 41(0.75,4.025) 42(0.25,4.025) 43(-0.25,4.025) 44(-0.75,4.025) 45(-1.25,4.025) 46(-1.75,4.025) 47(-2.25,4.025) 48(-2.75,4.025)
  silkscreen extent -4.15,-2.85 2.85,3.55, body extent -3.5,-3.5 3.5,3.5, height 1.6
STM-SOT-223_M [mm] "SOT223, 4-Leads, Body 6.7x3.7mm, Pitch 2.3mm, IPC Low Density"
  rect 2x1 smd: 1(-3.225,2.3) 2(-3.225,0) 3(-3.225,-2.3)
  rect 2x3.3 smd: 4(3.225,0)
  silkscreen extent -3.35,-3.35 1.95,3.47, body extent -3.5,-3.35 3.5,3.35, height 1.8

## Part data
C1: "GRM21BR71E225K, Конденсатор керамический smd 2.2мкФ X7R 25В 0805"
C2: "GRM31MR72A223K, Конденсатор керамический smd 0.022мкФ 100В X7R, 10%"
C3: "GRM21A5C2E220J, Конденсатор керамический smd 22пФ C0G 250B 5% 0805"
C4 C5: "B40940A8107M000, 100 мкФ, 63 В,10х12.5, 20%"
C6 C7 C8: "GRM21BR61E475KA12L, Конденсатор керамический smd 4.7 мкФ X5R 10% 25В 0805"
C9 C18 C19 C24 C33: "Конденсатор керамический smd 0.01 мкФ NPO 50В 5%"
C10 C49: "Capacitor SMD 0805 X7R 10uФ 25В 10%"
C11 C14 C16: "Конденсатор керамический smd 0.1 мкФ X7R 50В 10% 1206,"
C12 C15 C17: "Конденсатор керамический smd 1 мкФ X7R 50В,10%, 1206"
C13: "Конденсатор керамический smd 0.047мкФ X7R 50В 10% 0805"
C20 C21 C22 C23 C25 C26 C31 C47 C50: "Конденсатор керамический smd 1 мкФ X7R 10% 50В 0805"
C27 C34 C40 C42 C43 C44 C45 C46: "Конденсатор керамический smd 0.1 мкФ X7R 50В 10% 0805"
C28 C29 C30 C32: "Конденсатор керамический smd 0.15мкФ X7R 50В 10% 0805"
C35 C36 C37: "Конденсатор керамический smd 0.033мкФ X7R 50В 10% 0805"
C41: "Конденсатор керамический smd 4.7 мкФ X5R 10% 25В 0805"
D1: "BZX84-C12,215, Стабилитрон 12В, 5%"
D2 D3 D4: library part DIOD, "STPS2L40U, Диод Шоттки 40В 2А"
D5 D6: library part LED_G, "TO-3216BC-BF, Светодиод синий SMD 3216"
D7 D8 D9 D10 D11 D12 D13 D14 D15: library part CMP-02540-000037-1, "DIODE GEN PURP 200V 1A DO214AC", Capacitance="10 pF", Forward Current=1A, Manufacturer=Vishay, Max Junction Temp=+150°C, Max Repetitive Reverse Voltage=200V, Max Surge Forward Current=30A, Package=95400, Peak Reverse Current=5uA, Temperature="-55°C to +150°C", Temperature Range Low=-55°C, Automotive=No, Category=Diode, ComponentLink2Description=Datasheet, ComponentLink2URL=http://www.vishay.com/docs/88586/es1.pdf, Device Class L1="Discrete Semiconductors", Device Class L2=Diodes, Device Class L3="Rectifier Diodes", Digikey Description="DIODE GEN PURP 200V 1A DO214AC", Footprint Url=http://www.vishay.com/docs/95400/sma.pdf, Height=2.29mm, Lead Free=Yes, Manufacturer Part Number=ES1D-E3/61T, Mouser Description="Ultrafast Rectifier, Plastic Surface Mount, 1 A, 200 VDC, DO0214AC (SMA), RoHS", Octopart=https://octopart.com/es1d-e3%2F61t-vishay-39550266, RoHS=TRUE, Standoff Height=0mm, Temperature Range High=+150°C
D16 D17 D18: "TO-3216BC-BF, Светодиод синий SMD 3216"
HS1: "HS 145-100, Радиатор 100х100х26 мм"
IC1 IC2 IC3: "IR2110STRPBF, Полумостовой драйвер HIGH/LOW SIDE", Manufacturer_Name=Infineon, Mouser Part Number=942-IR2110STRPBF, Arrow Part Number=IR2110STRPBF, Arrow Price/Stock=https://www.arrow.com/en/products/ir2110strpbf/infineon-technologies-ag?region=nac, Datasheet Link=https://www.infineon.com/cms/en/product/power/gate-driver-ics/?, Height=2.65mm, Manufacturer_Part_Number=IR2110STRPBF, Mouser Price/Stock=https://www.mouser.co.uk/ProductDetail/Infineon-Technologies/IR2110STRPBF?qs=2r01AXMCG3P4pNuJUqFzxg%3D%3D
J2: library part Jumper3, "PLS-3 (DS1021-1x3), Вилка штыревая 2.54мм 1x3pin"
J4: library part "Header 1x5", "PLS-5 (DS1021-1x5), Вилка штыревая 2.54мм 1x5pin"
J5: "Вилка на плату прямая 2x5 2.54мм"
J6: library part "Header 2x4"
J7: library part "Header 1x4", "PLS-4 (DS-1021-1x4), Вилка штыревая 2.54мм 1x4pin"
L1: library part L, "HE1040 101M2B 100мкГн ± 25%"
P1: library part CMP-002-00025-2, "Male Header, Pitch 3.96 mm, 1 x 2 Position, Height 10.9 mm, Tail Length 3.7 mm, -25 to 85 degC, RoHS, Bulk", Manufacturer=JST, Max Operating Temperature=85°C, Min Operating Temperature=-25°C, Package Description="Male Header, Pitch 3.96 mm, 1 x 2 Position, Height 10.9 mm, Tail Length 3.7 mm", Case/Package=B2P-VH(LF)(SN), Connector Type=Header, Datasheet URL=http://www.jst-mfg.com/product/pdf/eng/eVH.pdf, Datasheet Version=May-16, Gender=Male, Manufacturer URL=http://www.jst.com/home2.html, Mounting Technology=TH, Package Reference=B2P-VH(LF)(SN), RoHS Compliant=Unknown
Q1 Q2: library part PMOS, "IRF4905STRLPBF, Транзистор HEXFET, P-канал, 55В, 74А"
Q3 Q4 Q5 Q6 Q7 Q8: library part NMOS, "IRF1010ZSTRLPBF, Транзистор HEXFET N-канал 55В 75А", Source=https://www.chipdip.ru/product/irf1010zstrlpbf-infineon
Q9 Q10 Q11 Q12 Q13 Q14 Q15: "BC817,215, Транзистор NPN 45В 0.5А"
R1: "0.125Вт 0805 13 кОм, 1%"
R2 R48 R49 R50 R51 R52 R53 R61 R62 R63 R64: "0.125Вт 0805 4.7 кОм, 1%"
R3: "0.125Вт 0805 43 кОм, 1%"
R4: "0.125Вт 0805 5.1 кОм, 1%"
R5 R13 R14 R47 R75 R76 R77: "0.125Вт 0805 1 кОм, 1%"
R6: "0.125Вт 0805 330 Ом"
R7 R9 R15 R17 R24 R26: library part Resistor, "0.25Вт 1206 20 Ом, 1%"
R8 R10 R16 R18 R25 R27: library part Resistor, "0.25Вт 1206 (перемычка) 0 Ом"
R11 R12 R19 R20 R28 R29: library part Resistor, "0.125Вт 0805 10 кОм, 1%"
R33 R37 R43 R45: "0.125Вт 0805 12 кОм, 1%"
R34 R38 R44 R46: "0.125Вт 0805 1.5 кОм, 1%"
R35: "0.125Вт 0805 47 кОм, 1%"
R36: "0.125Вт 0805 7.5 кОм, 1%"
R39 R40: "0.125Вт 0805 9.1 кОм, 1%"
R41 R42: "0.125Вт 0805 68 кОм, 1%"
R54 R55 R56 R57 R65 R66 R67 R68 R78: "0.125Вт 0805 10 кОм, 1%"
R58 R59 R60 R69 R70 R71 R72 R73 R74: "0.125Вт 0805 (перемычка) 0 Ом, 1%"
R79: "0.125Вт 0805 120 Ом, 1%"
SW1: library part CMP-011-00004-2, "Tactile Switch, SPST-NO, 0.05 A, 24 V, -25 to 70 degC, 4-Pin THD, RoHS, Bulk", Contact Current Rating=50mA, Manufacturer="Omron Electronic Components", Max Contact Resistance=100mohm, Max Operating Temperature=70°C, Max Voltage Rating (DC)=24V, Min Operating Temperature=-25°C, Operating Force=100gf, Package Description="4-Pin Through Hole Device, Body 6 x 6 mm", Package Quantity=1500, Resistance=0.1Ohm, Case/Package=B3F-1000, Contact Material=Gold, Contact Plating=Gold, Current Rating=50mA, Datasheet URL=http://www.omron.com/ecb/products/pdf/en-b3f.pdf, Datasheet Version=Jan-15, Manufacturer URL=http://www.omron.com/, Max Current Rating=50mA, Mounting Technology=TH, Package Reference=B3F-1000, Packaging=Bulk, Pins=4, RoHS Compliant=True, Throw Configuration=SPST, Voltage Rating=24V, Voltage Rating (DC)=24V
U1: "Buck Switching Regulator IC Positive Adjustable 1.235V 1 Output 2A 8-SOIC (0.154\", 3.90mm Width)"
U2: library part CMP-019-00019-3, "Low Drop Positive Voltage Regulator, 800 mA, Fixed 3.3 V Output, 0 to 125 degC, 3-Pin TO-220, RoHS, Tape and Reel", Case/Package=TO-261-4, Dropout Voltage=1.1V, Manufacturer=STMicroelectronics, Max Input Voltage=15V, Max Operating Temperature=125°C, Max Ouput Current=1.3A, Min Input Voltage=4.75V, Min Operating Temperature=0°C, Nominal Output Voltage=3.3V, Output Current=950mA, Package Description="4-Pin Small Outline Transistor, Body 6.5 x 3.5 mm, Pitch 2.3 mm", Package Quantity=2500, Package Reference=SOT-223, Power=12W, Datasheet URL=http://www.farnell.com/datasheets/1776449.pdf, Datasheet Version="Rev. 33, 11/2013", Manufacturer URL=http://www.st.com/, Max Supply Voltage=15V, Min Supply Voltage=4.75V, Mounting Technology=SM, Output Voltage=3.3V, Outputs=1, Packaging=TapeandReel, Pins=3, RoHS Compliant=True
U3: library part CMP-0017-00420-2, "Dual High-Speed Low-Noise Operational Amplifier, 10 to 36 V, -40 to 85 degC, 8-pin SOIC (D8), Green (RoHS & no Sb/Br)", Manufacturer="Texas Instruments", Rating=Catalog, Total Supply Voltage(Max)(+5V is 5, +/-5V is 10)=36, Total Supply Voltage(Min)(+5V is 5, +/-5V is 10)=10, CMRR(Min)(dB)=80, Code_JEDEC=MS-012, ComponentLink1Description="Manufacturer URL", ComponentLink1URL=http://www.ti.com/, ComponentLink2Description=Datasheet, ComponentLink2URL=http://www.ti.com/lit/ds/symlink/mc33078.pdf, ComponentLink3Description="Package Specification", ComponentLink3URL=http://www.ti.com/litv/pdf/msoi002j, DatasheetVersion=SLLS633C, Eco-Plan="Green (RoHS & no Sb/Br)", GBW(Typ)(MHz)=16, IIB(Max)(pA)=750000, Iq per channel(Max)(mA)=2.5, Mounting Technology="Surface Mount", Number of Channels=2, Offset Drift(Typ)(uV/C)=2, PackageDescription="8-Pin Plastic Small Outline, Body 4.9 x 3.9 mm, Pitch 1.27 mm", PackageReference=D0008A, PackageVersion="4040047-3/M, 06/2011", PartNumber=MC33078DR, Slew Rate(Typ)(V/us)=7, Sub Family="General Purpose Amplifier, High Supply Voltage Amplifier (>=30V), Low Noise Amp (<=10nV/rtHz)", Vio (25C)(Max)(mV)=2, Vn at 1kHz(Typ)(nV/rtHz)=4.5
U4: library part CMP-0572-00014-2, "ARM Cortex-M4 32-bit MCU, 128 KB Flash, 32 KB Internal RAM, 37 I/Os, 48-pin LQFP, -40 to 85 degC, Tray", I/Os (High Current)=37, Operating Frequency(F) (Processor speed) (MHz)=72, Supply Voltage(Vcc) min (V)=2, ComponentLink1Description="Manufacturer URL", ComponentLink1URL=http://www.st.com/web/en/home.html, ComponentLink2Description=Datasheet, ComponentLink2URL=http://www.st.com/st-web-ui/static/active/en/resource/technical/document/datasheet/DM00058181.pdf, ComponentLink3Description="Package Specification", ComponentLink3URL=http://www.st.com/st-web-ui/static/active/en/resource/technical/document/datasheet/DM00058181.pdf, Core="ARM Cortex-M4", D/A Converter="2x12-bit (2 Channel)", DatasheetVersion="Rev. 6", FLASH Size (Prog) (kB)=128, Internal RAM Size (kB)=32, Mounting Technology="Surface Mount", PackageDescription="48-Pin Low Profile Quad Flat Package, 7 x 7 mm Body, 0.5 mm Pitch", PackageReference=LQFP48, PackageVersion="Rev. 6, 06/2013", Packing=Tray, PartNumber=STM32F303CBT6
U5: library part CMP-0315-00015-3, "IC TRANSCEIVER HALF 1/1 8SOIC", Case/Package=D, Max Operating Temperature=85°C, Max Supply Current=17mA, Max Supply Voltage=3.6V, Min Operating Temperature=-40°C, Min Supply Voltage=3V, Operating Supply Voltage=3.3V, Package Quantity=1, Contact Plating=Gold, Data Rate=1Mbps, Lead Free="Lead Free", Nominal Supply Current=17mA, Number of Drivers=1, Number of I/Os=2, Number of Pins=8, Number of Receive Buffers=1, Number of Receivers=1, Number of Transceivers=1, Number of Transmit Buffers=1, Packaging="Tape and Reel", Radiation Hardening=No, REACH SVHC="No SVHC", Termination=SMD/SMT, Weight=0.002561oz
Y1: library part CMP-2000-07595-1, "Crystal Unit, 8 MHz, 8 pF, -40 to 150 degC, 2-Pin SMD, RoHS, Tape and Reel", Case/Package=SMD/SMT, ESR (Equivalent Series Resistance)=500Ohm, Frequency=8MHz, Frequency Stability=150ppm, Frequency Tolerance=50ppm, Load Capacitance=8pF, Manufacturer=NDK, Max Operating Temperature=150degC, Min Operating Temperature=-40degC, Package Description="2-Pin Surface Mount Device, Body 3.2 x 2.5 mm", Package Quantity=3000, Datasheet URL=http://www.ndk.com/images/products/catalog/c_NX3225GD-STD-CRA-3_e.pdf, Datasheet Version=11/2016, Height=0.039inch, Length=0.126inch, Manufacturer URL=http://www.ndk.com/en/, Mount=SurfaceMount, Mounting Technology=SurfaceMount, Number of Pins=2, Package Reference=NX3225GD-8MHZ-STD-CRA-3, Packaging=TapeandReel, RoHSCompliant=True, Width=0.098inch

## Via types
v1: diameter 0.7, hole 0.3, Top Layer to Bottom Layer, 777 vias

## Nets (pads, with @x,y where several pads share a name; then routed paths per layer and width w, separated by ;. In a path a pad name is that pad's centre, name@x,y a point inside that pad or via, vN(x,y) a via of type N, cw(c..) or ccw(c..) an arc to the next point about the centre after c; other vN are vias at no path point)
+3.3: C10.1 C41.1 C42.1 C43.1 C44.1 C45.1 C46.1 C47.2 C48.2 C49.1 J4.1 J6.1 J7.1 R6.2 R48.2 R49.2 R50.2 U2.2 U2.4 U4.1 U4.9 U4.24 U4.36 U4.48 U5.3 | length 130.3
  Top Layer w0.2: C46.1@25.461,52.111 25.567,52.005 26.204,52.005 26.479,52.28 26.919,52.28 U4.48@28.126,51.074 ; C44.1@27.614,43.386 29.061,44.834 29.381,44.834 U4.9@30.954,46.407 ; U4.36@33.835,54.945 35.505,56.615 C42.1@35.505,56.965
  Top Layer w0.25: C45.1@25.931,47.041 U4.1@28.126,49.235 ; U4.24@37.742,49.235 37.756,49.235 38.319,48.672 40.328,48.672 C43.1@40.434,48.566
  Top Layer w0.5: J6.1@2,49 2,51.2 3.6,52.8 v1(15,52.8) ; J7.1@2,62.54 3.46,64 v1(10,64) ; U5.3@14.414,59.635 14.437,59.612 17.788,59.612 C48.2@18,59.4 ; R6.2@20.3,100.5 37.171,100.5 37.771,99.9 v1(37.825,99.9) ; v1(23.7,52.725) 23.754,52.725 24.262,52.217 25.355,52.217 C46.1@25.461,52.111 ; v1(30.8,70) 30.823,70.023 32.577,70.023 R49.2@32.6,70.046 ; R50.2@40.15,71.75 40.175,71.725 41.875,71.725 v1(41.9,71.7)
  Top Layer w1: C48.2@18,59.4 C47.2@20.5,59.4 v1(22.1,59.4) ; v1(22.75,48) 24.845,48 25.861,46.985 C45.1@25.931,46.985 ; v1(24.25,38.5) 24.25,40.005 C44.1@27.622,43.378 ; R48.2@27.6,72.25 27.6,73.53 29.17,75.1 J4.1@29.17,75.25 29.25,75.33 v1(29.25,78.5) ; v1(33.25,62.5) 33.25,59.291 34.005,58.536 C41.1@34.005,58.465 C42.1@35.505,56.965 ; C43.1@40.434,48.566 40.47,48.601 41.868,50 v1(44.704,50)
  Bottom Layer w0.5: 24,70.1 24.1,70 v1(30.8,70) ; v1(37.825,99.9) 42.5,95.225 v1(42.5,85) ; 41.8,77.8 41.9,77.7 v1(41.9,71.7)
  other v1: 41,82 42.5,82 44,82 41,83.5 42.5,83.5 44,83.5 41,85 44,85
+12: C18.1 C19.1 C21.2 C23.2 C24.1 C26.2 C31.1 C34.1 D3.2 IC1.3 IC1.11 IC2.3 IC2.11 IC3.3 IC3.11 J2.2 R5.2 R30.1 R31.1 R32.1 R35.2 R54.2 R55.1 R56.1 R57.1 R65.1 R66.1 R67.1 U3.8 | length 153.8
  Top Layer w0.5: R5.2@20.3,106 31.5,106 35.957,101.543 44,101.543 ; C31.1@48.95,11.75 48.995,11.795 U3.8@51.075,11.795 ; C18.1@64.5,34.405 IC1.11@67.288,34.405 ; C24.1@64.5,63 64.503,63.003 67.285,63.003 IC3.11@67.288,63.005 ; C19.1@64.5,91.905 64.509,91.914 67.279,91.914 IC2.11@67.288,91.922 ; C26.2@71.6,54 71.6,56.7 74.095,59.195 IC3.3@76.712,59.195 ; C23.2@72.1,83 72.1,85.4 74.812,88.112 IC2.3@76.712,88.112 ; C21.2@72.6,25.5 72.6,28.8 74.395,30.595 IC1.3@76.712,30.595
  Top Layer w1: D3.2@32.36,97.5 44.586,97.5 ; J2.2@44,105 44,101.543 44,98.086 44.586,97.5 ; R35.2@44.15,17.65 44.15,19.55 45.1,20.5 v1(47.5,20.5) ; C34.1@46.7,11.75 C34.1@46.85,11.75 ; v1(47.7,13.9) 47.7,13.827 46.9,13.027 46.9,11.8 C34.1@46.85,11.75 ; C31.1@48.95,11.75 C34.1@46.85,11.75 ; R67.1@58.932,27.525 58.932,27.513 61.588,27.513 v1(61.6,27.5) ; R65.1@58.932,43.116 58.932,43.108 61.592,43.108 v1(61.6,43.1) ; R66.1@58.932,55.251 58.932,55.226 61.674,55.226 v1(61.7,55.2) ; R56.1@59,63.002 61.575,63.001 61.576,63 C24.1@64.5,63 ; R57.1@59.28,84.961 59.28,84.981 61.681,84.981 v1(61.7,85) ; R54.2@59.4,74 v1(61.5,74) ; R55.1@59.5,92 59.5,91.895 v1@62.155,91.895 ; v1(61.8,40) R30.1@65.331,40 ; v1(61.804,34.402) 64.498,34.402 C18.1@64.5,34.405 ; v1(62.2,68.5) R32.1@65.1,68.5 ; v1(62.228,91.895) 62.234,91.9 64.495,91.9 C19.1@64.5,91.905 ; R31.1@65.1,97.5 62,97.5 61.5,98 52.993,98 52.493,97.5 44.586,97.5 ; v1(71.6,51) C26.2@71.6,54 ; v1(72.1,80.2) C23.2@72.1,83 ; v1(72.6,22.4) C21.2@72.6,25.5
  other v1: 61.7,63 60.5,96.5 61.625,96.5 62.725,96.5 60.9,98 62,98
+E5: D4.2 J5.9 J5.10 | length 22.1
  Top Layer w1.5: J5.10@4,84.08 J5.9@6.54,84.08 6.64,84.08 12.06,89.5 D4.2@23.89,89.5
+E12: J2.1 P1.1 | length 20.3
  Top Layer w1: P1.1@31.04,121 31.04,115.57 41.46,105.15 J2.1@41.46,105
adc_dc: R74.1 U4.12 | length 11
  Top Layer w0.25: R74.1@30.1,35.2 30,35.3 30,36.5 31.25,37.75 31.25,44.582 U4.12@32.015,45.346
adc_i: R73.1 U4.11 | length 12.1
  Top Layer w0.25: R73.1@27.832,35.172 28,35.34 28,37 30.75,39.75 30.75,44.775 31.661,45.686 U4.11@31.661,45.7
CAN_RX: U4.45 U5.4 | length 19.5
  Top Layer w0.25: U5.4@14.414,60.905 22.239,60.905 23.402,59.742 23.402,57.919 U4.45@29.186,52.134
CAN_TX: U4.46 U5.1 | length 17.6
  Top Layer w0.25: U5.1@14.414,57.095 14.414,56.486 15.65,55.25 18.586,55.25 19.336,56 24.614,56 U4.46@28.833,51.781
CANH: J7.3 R79.2 U5.7 | length 8
  Top Layer w0.5: J7.3@2,57.46 2.475,57.46 3.115,58.1 R79.2@6,58.1 6.175,58.1 6.44,58.365 U5.7@9.586,58.365
CANL: J7.2 R79.1 U5.6 | length 7.7
  Top Layer w0.5: J7.2@2,60 2.05,59.95 5.95,59.95 R79.1@6,59.9 6.175,59.9 6.44,59.635 U5.6@9.586,59.635
com: C21.1 C23.1 C26.1 IC1.2 IC2.2 IC3.2 Q4.S Q6.S Q8.S R12.1 R13.1 R20.1 R21.2 R22.2 R23.2 R29.1 | length 112.6
  Top Layer w0.5: R13.1@66.85,14.45 79.95,14.45 81,15.5 R23.2@81,16.425 ; IC1.2@76.712,29.325 75.025,29.325 74.4,28.7 C21.1@74.4,25.5 74.4,24.1 76.04,22.46 Q8.S@93.015,22.46 92.975,22.5 90,22.5 89,23.5 R29.1@89,26.35 ; IC3.2@76.712,57.925 74.925,57.925 73.4,56.4 C26.1@73.4,54 73.5,53.9 73.5,52.5 75.04,50.96 90.04,50.96 ; IC2.2@76.712,86.842 75.142,86.842 73.9,85.6 C23.1@73.9,83 74,82.9 74,81.75 75.79,79.96 90.54,79.96 ; R20.1@89,54.6 89,52 90.04,50.96 ; R12.1@89,83.6 89,81.5 90.54,79.96 ; Q6.S@93.015,50.96 90.04,50.96 ; Q4.S@93.015,79.96 90.54,79.96
  other v1: 79.7,17.9 81.8,17.9 83.9,17.9 86,17.9 88.1,17.9 90.2,17.9 92.3,17.9 94.4,17.9 80.75,20 82.85,20 84.95,20 87.05,20 89.15,20 91.25,20 93.35,20 79.7,22.1 81.8,22.1 83.9,22.1 86,22.1 88.1,22.1 90.2,22.1 79.7,26.3 81.8,26.3 83.9,26.3 86,26.3 88.1,30.5 90.2,30.5 92.3,30.5 82.85,32.6 89.15,32.6 88.1,34.7 82.85,36.8 84.95,36.8 87.05,36.8 82.85,41 89.15,41 80.75,45.2 82.85,45.2 84.95,45.2 87.05,45.2 89.15,45.2 91.25,45.2 93.35,45.2 80.75,49.4 82.85,49.4 84.95,49.4 87.05,49.4 89.15,49.4 79.7,51.5 81.8,51.5 83.9,51.5 86,51.5 88.1,51.5 90.2,51.5 80.75,53.6 82.85,53.6 84.95,53.6 87.05,53.6 91.25,53.6 93.35,53.6 82.85,57.8 89.15,57.8 91.25,57.8 93.35,57.8 88.1,59.9 90.2,59.9 92.3,59.9 87.05,62 89.15,62 83.9,64.1 86,64.1 79.7,68.3 88.1,68.3 90.2,68.3 92.3,68.3 94.4,68.3 79.7,72.5 81.8,72.5 83.9,72.5 86,72.5 88.1,72.5 90.2,72.5 92.3,72.5 94.4,72.5 80.75,74.6 82.85,74.6 84.95,74.6 87.05,74.6 89.15,74.6 91.25,74.6 93.35,74.6 80.75,78.8 82.85,78.8 84.95,78.8 87.05,78.8 89.15,78.8
COMP: C2.1 C3.1 U1.4 | length 5
  Top Layer w0.4: U1.4@67.3,111.253 67.392,111.345 U1.4@67.575,111.345 ; C2.1@67.45,106.65 67.55,106.75 C3.1@67.55,108.75 U1.4@67.55,111.253
comp_u: R69.1 U4.17 | length 12.2
  Top Layer w0.25: U4.17@35.267,46.76 36.75,45.278 R69.1@36.75,35.15
comp_v: R70.1 U4.18 | length 13.9
  Top Layer w0.2: U4.18@35.621,47.114 37.187,45.548 37.187,45.509 38.671,44.025 38.671,43.833 40.4,42.104 R70.1@40.4,35.2
comp_w: R71.1 U4.22 | length 16.9
  Top Layer w0.2: U4.22@37.035,48.528 37.953,47.611 37.953,47.443 37.978,47.418 37.978,47.275 39.143,46.109 39.244,46.109 45.3,40.054 R71.1@45.3,35.1
DAC1: R76.2 U4.14 | length 37.9
  Top Layer w0.2: v1(12.9,22.675) 12.9,20.4 R76.2@13,20.3 ; U4.14@34.207,45.7 35.525,44.381 v1(35.525,42.8)
  Bottom Layer w0.2: v1(12.9,22.675) 17.175,22.675 35.525,41.025 v1(35.525,42.8)
DAC2: R75.2 U4.15 | length 36.5
  Top Layer w0.2: R75.2@16.25,20.4 16.3,20.45 v1(16.3,21.875) ; U4.15@34.56,46.053 36.229,44.385 36.229,40.903 35.975,40.649 v1(35.975,38.325)
  Bottom Layer w0.2: v1(16.3,21.875) 17.625,21.875 34.075,38.325 v1(35.975,38.325)
FB: R3.1 R4.2 U1.5 | length 4.8
  Top Layer w0.4: U1.5@73.025,111.345 72.892,111.345 72.8,111.253 R4.2@72.8,109.2 R3.1@75.3,109.2